# Altium PCB 项目-6层核心板.PcbDoc (part 1 of 3)
Units mil, origin at the board's own origin, x right, y up, seen from the top; angles counter-clockwise.
Board outline 2165.35 x 1574.8 mil, 6 copper layers (TOP, GND02, ART03, ART04, PWR05, BOTTOM); 172 components, 0 nets, 834 pads, 541 vias.
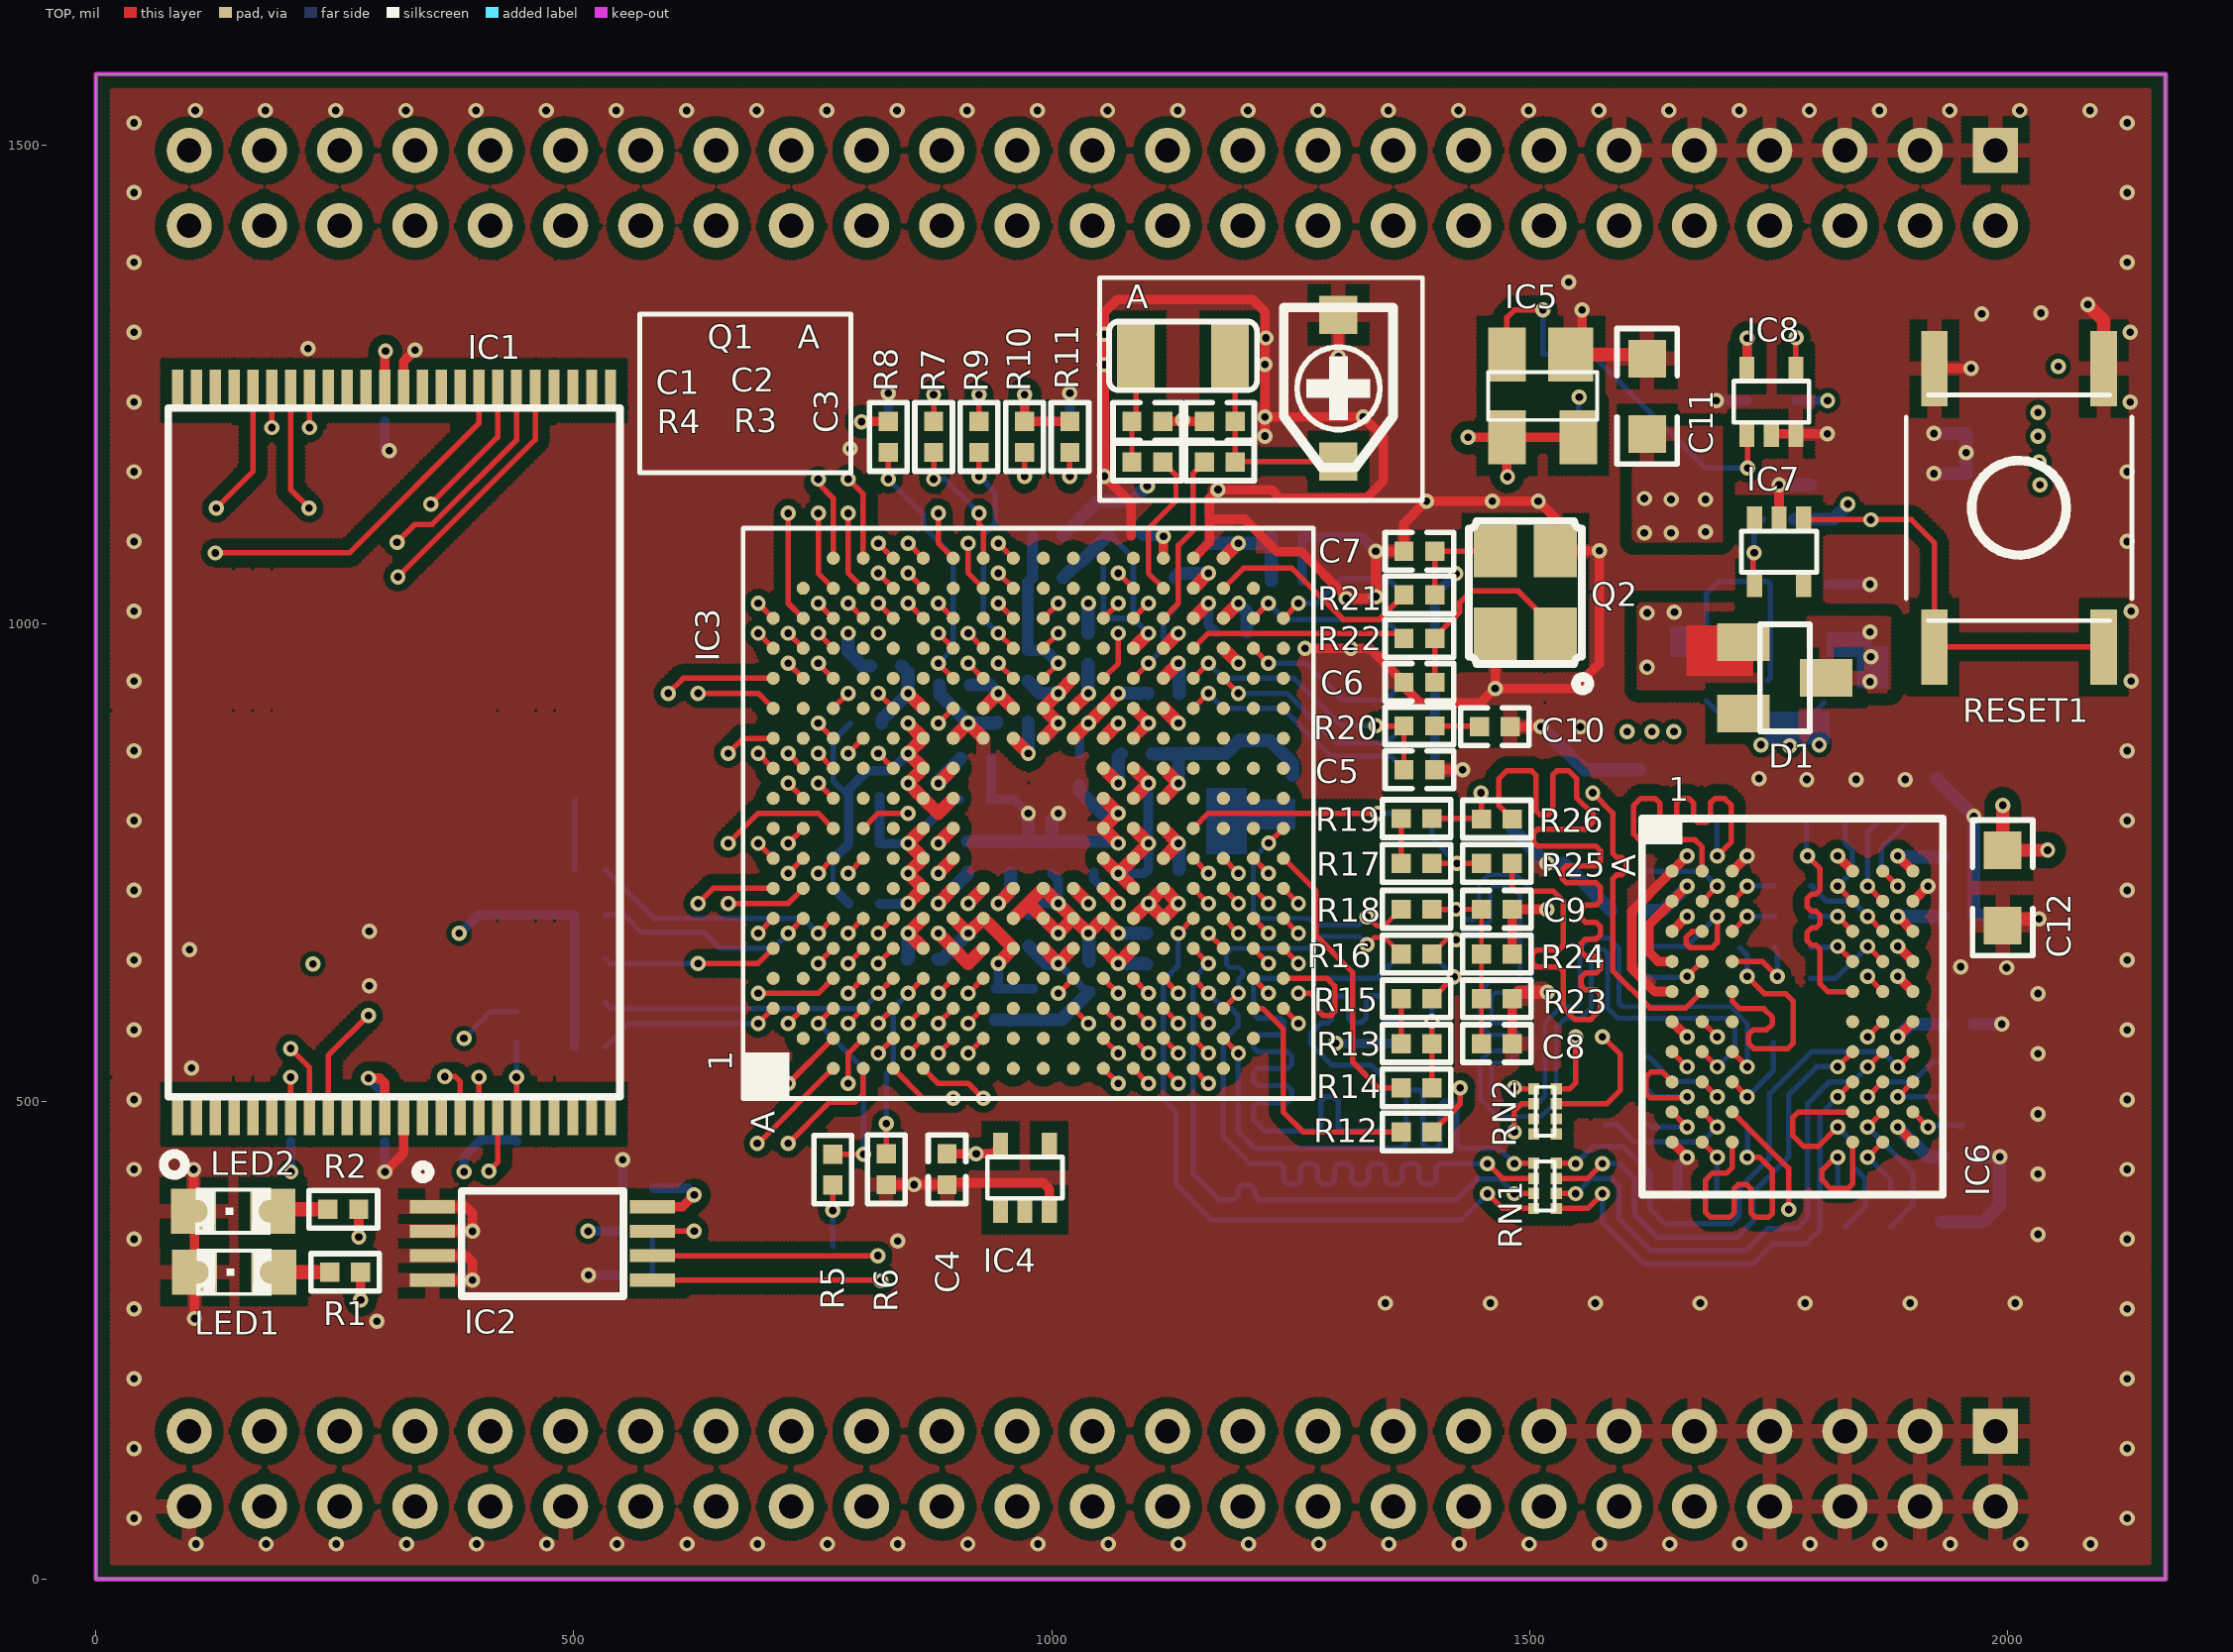
[diagram p0: TOP view]
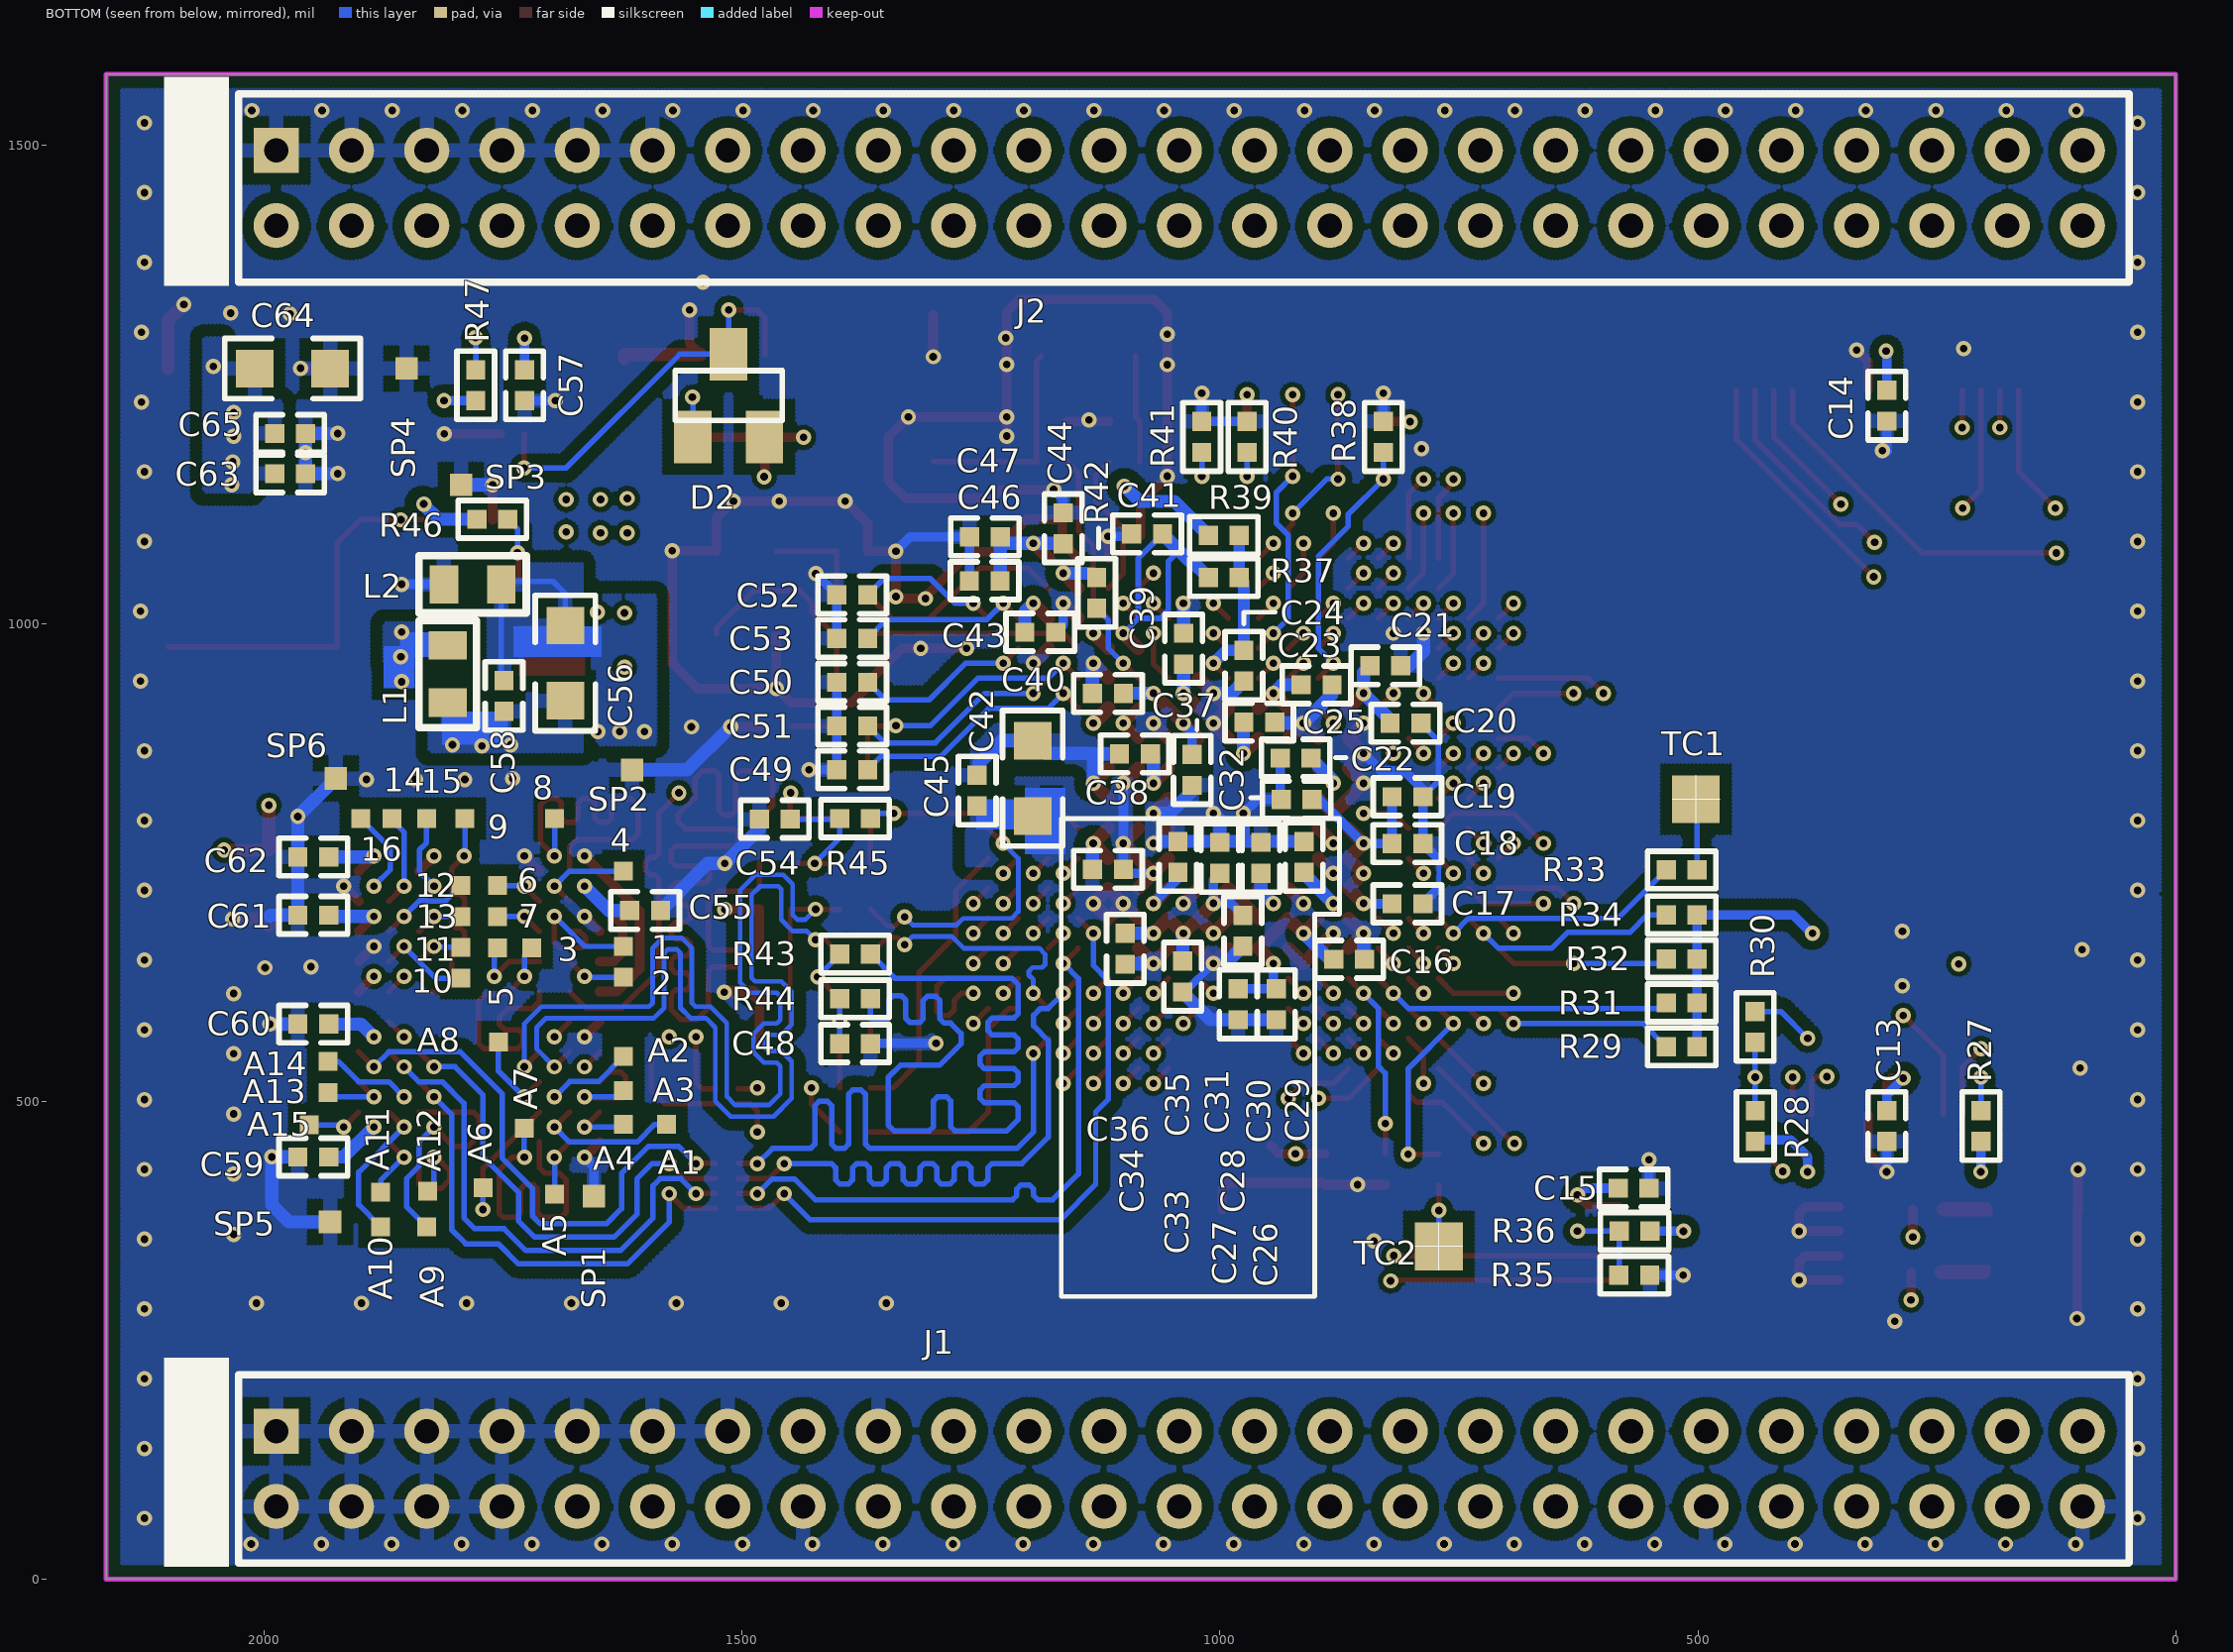
[diagram p1: BOTTOM view, seen from below]
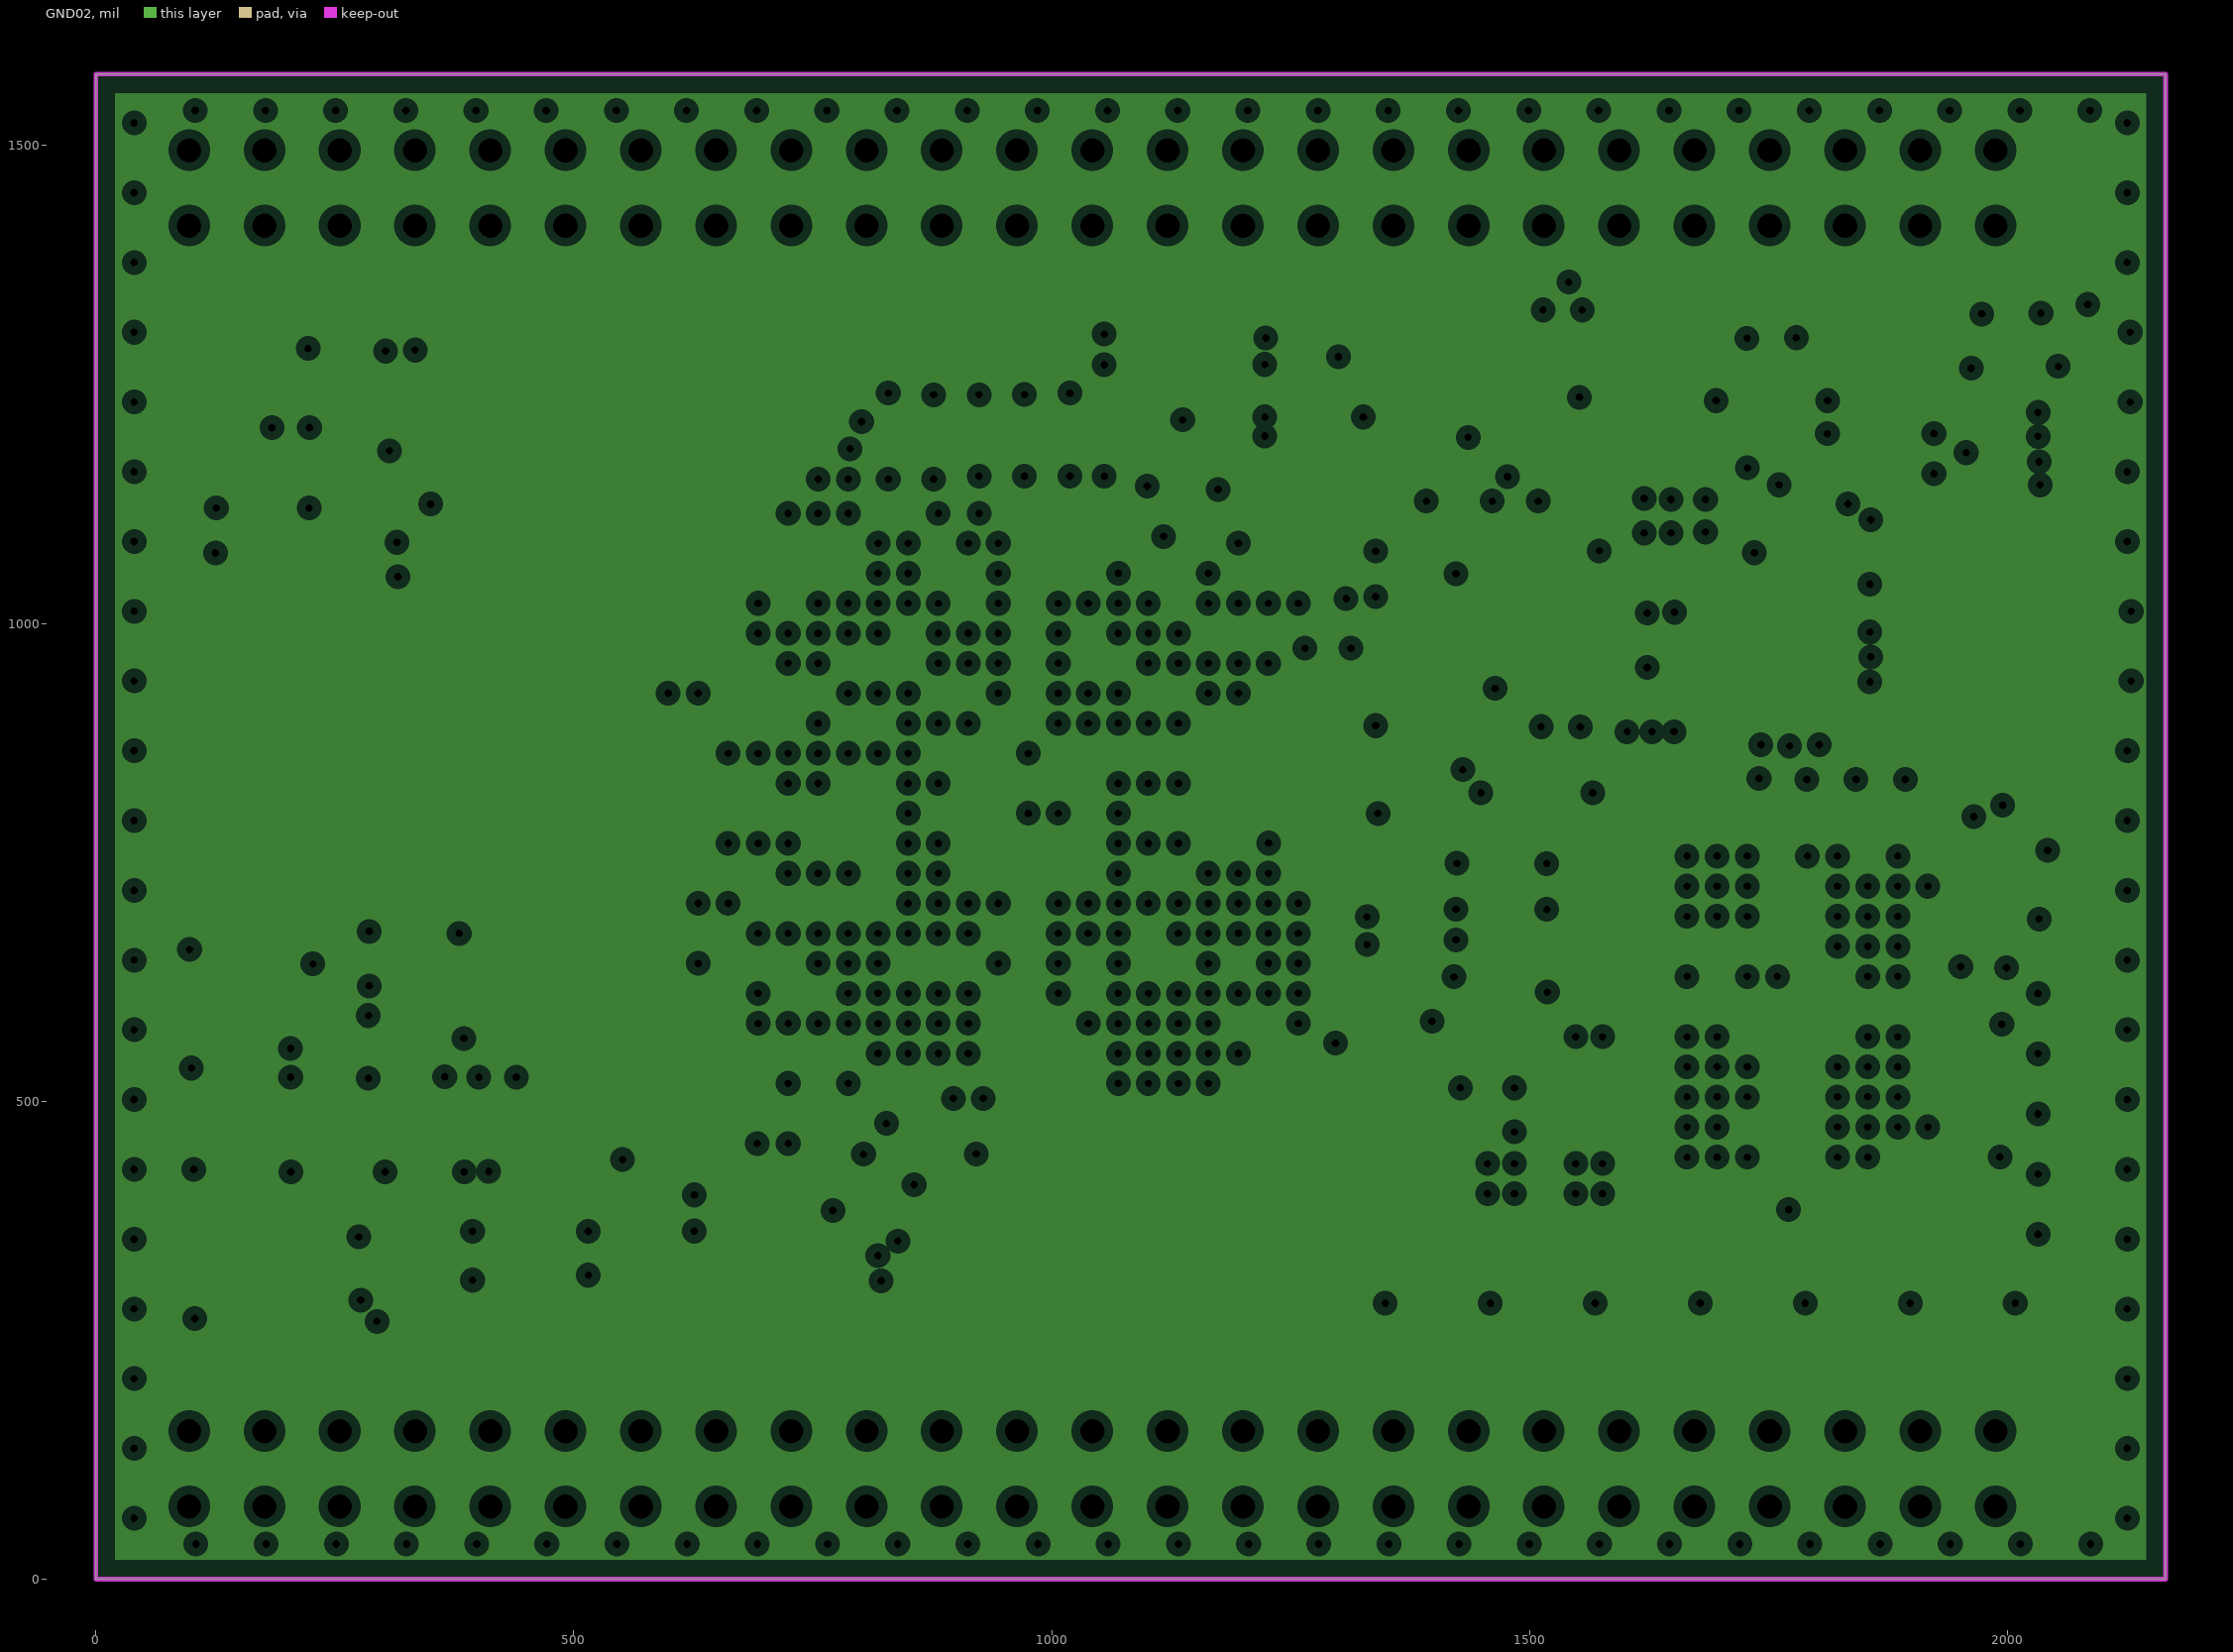
[diagram p2: GND02, clearances drawn from the general rule]
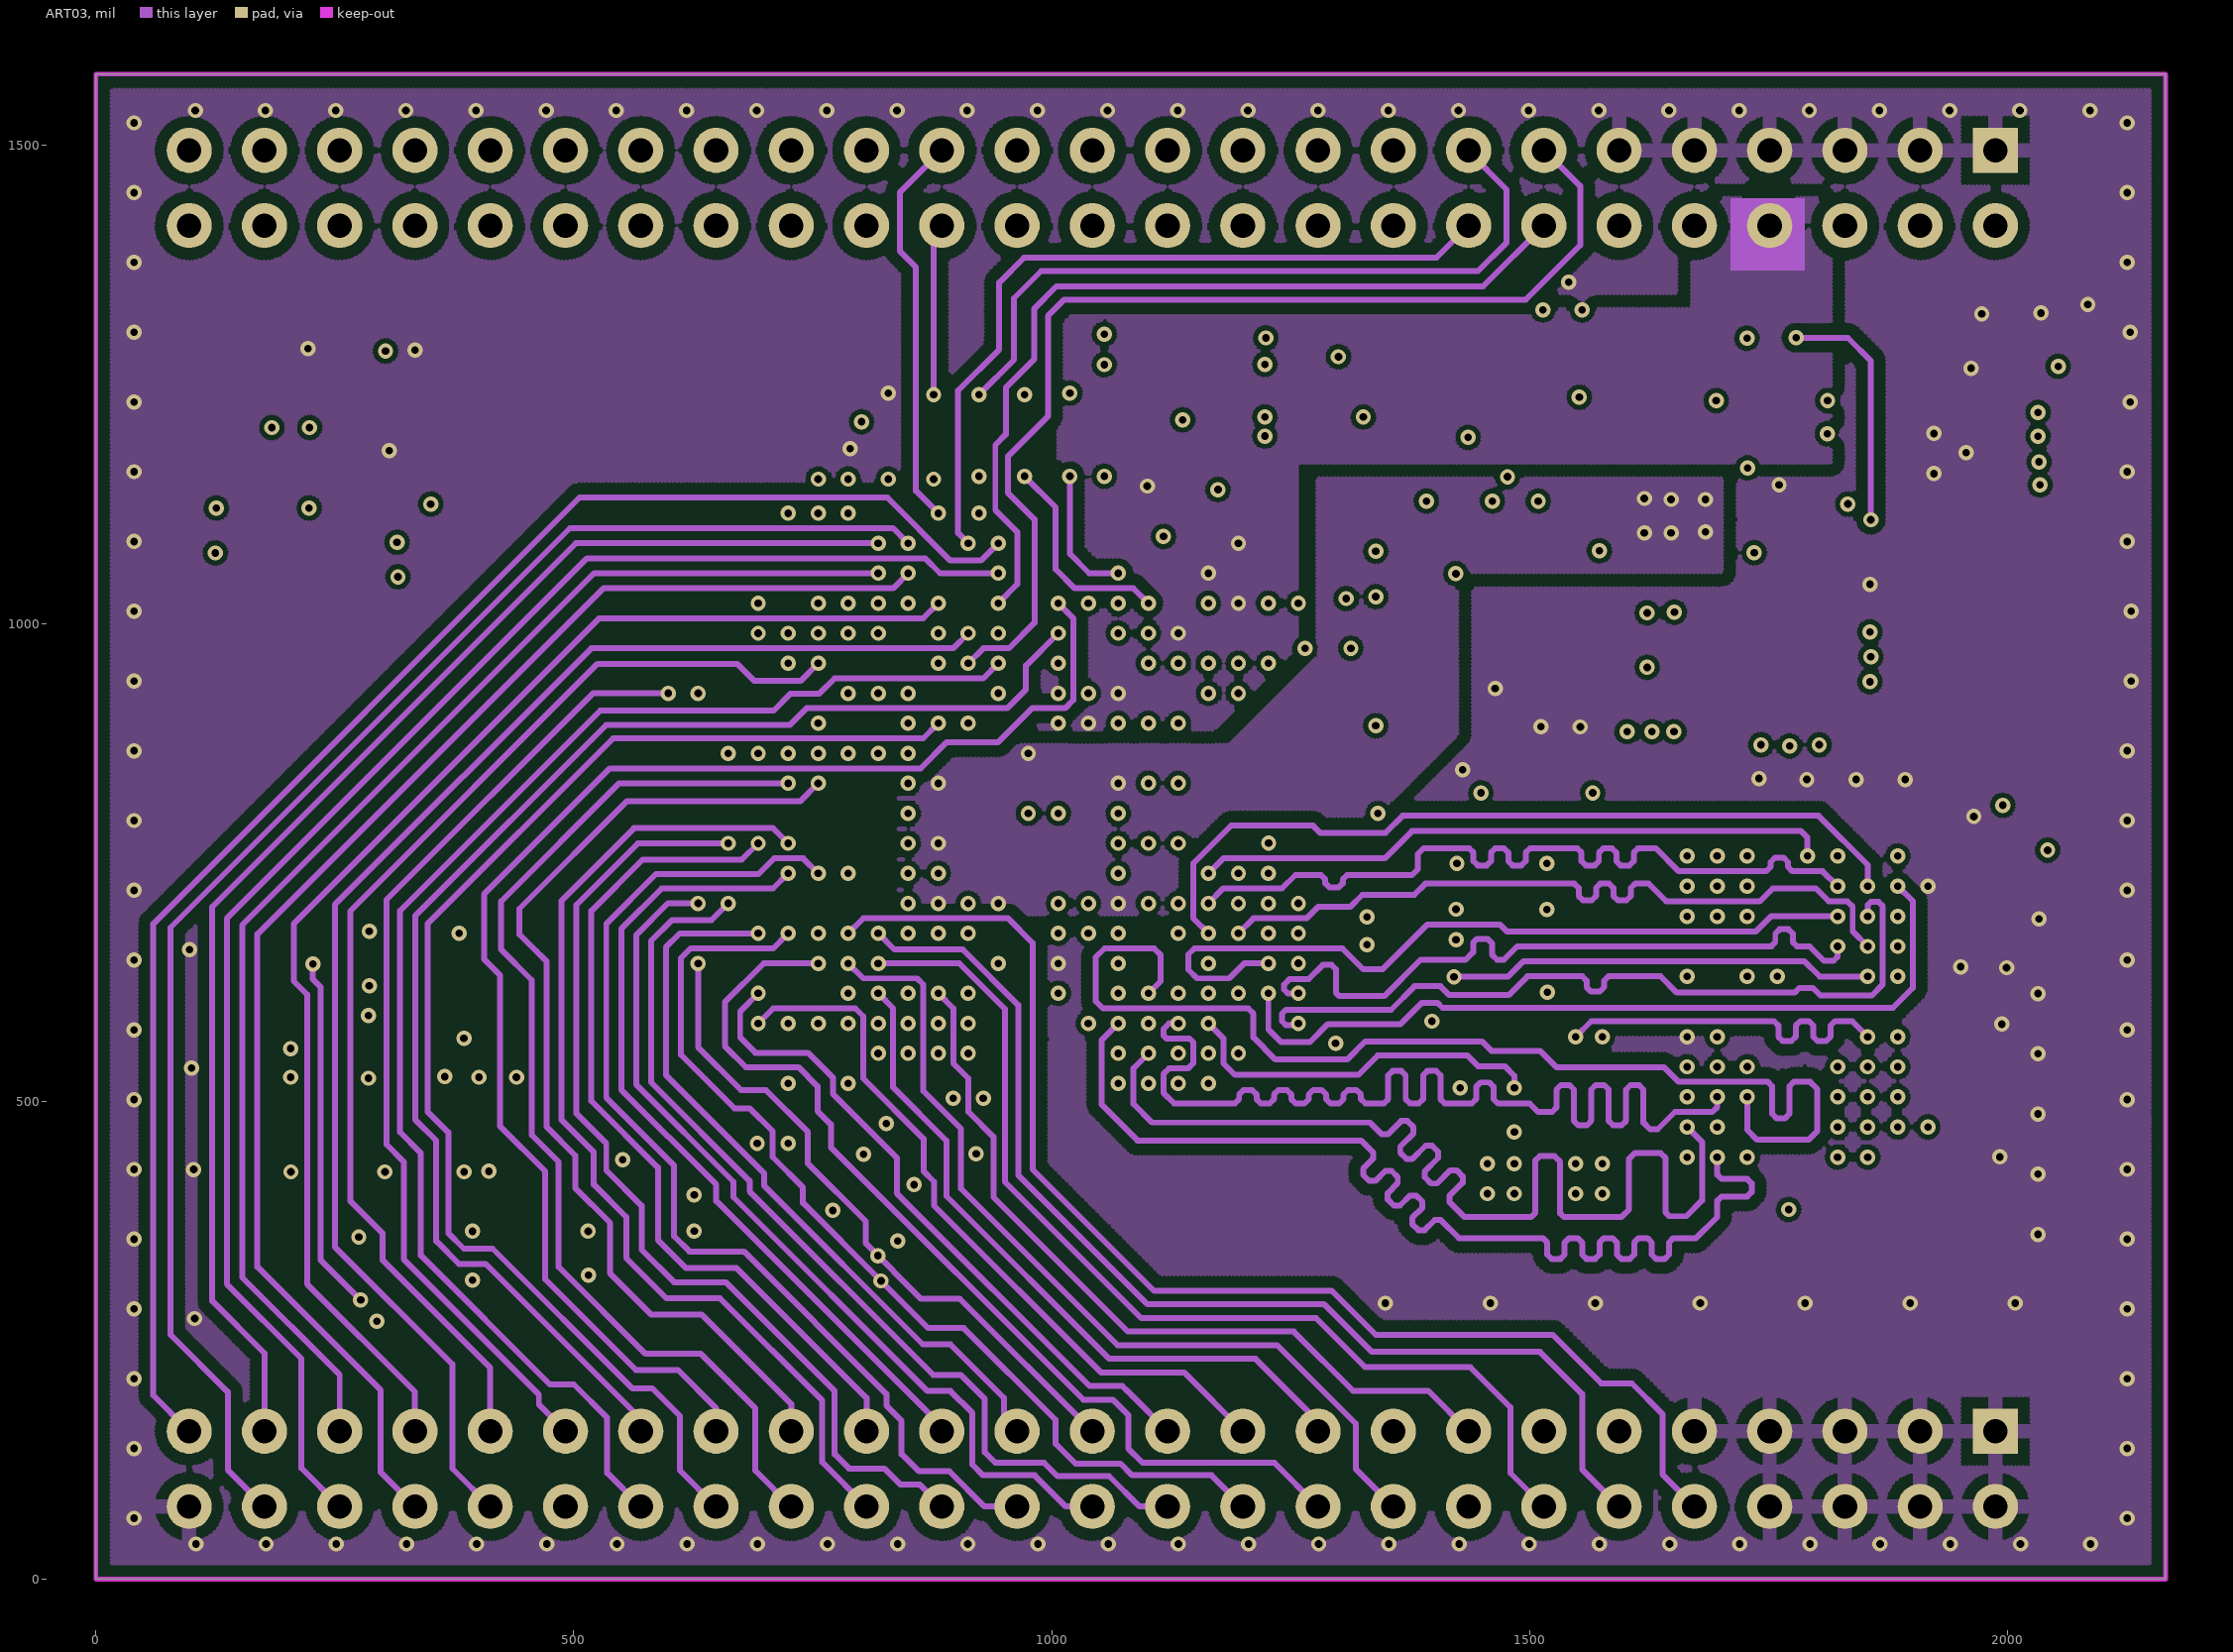
[diagram p3: ART03]
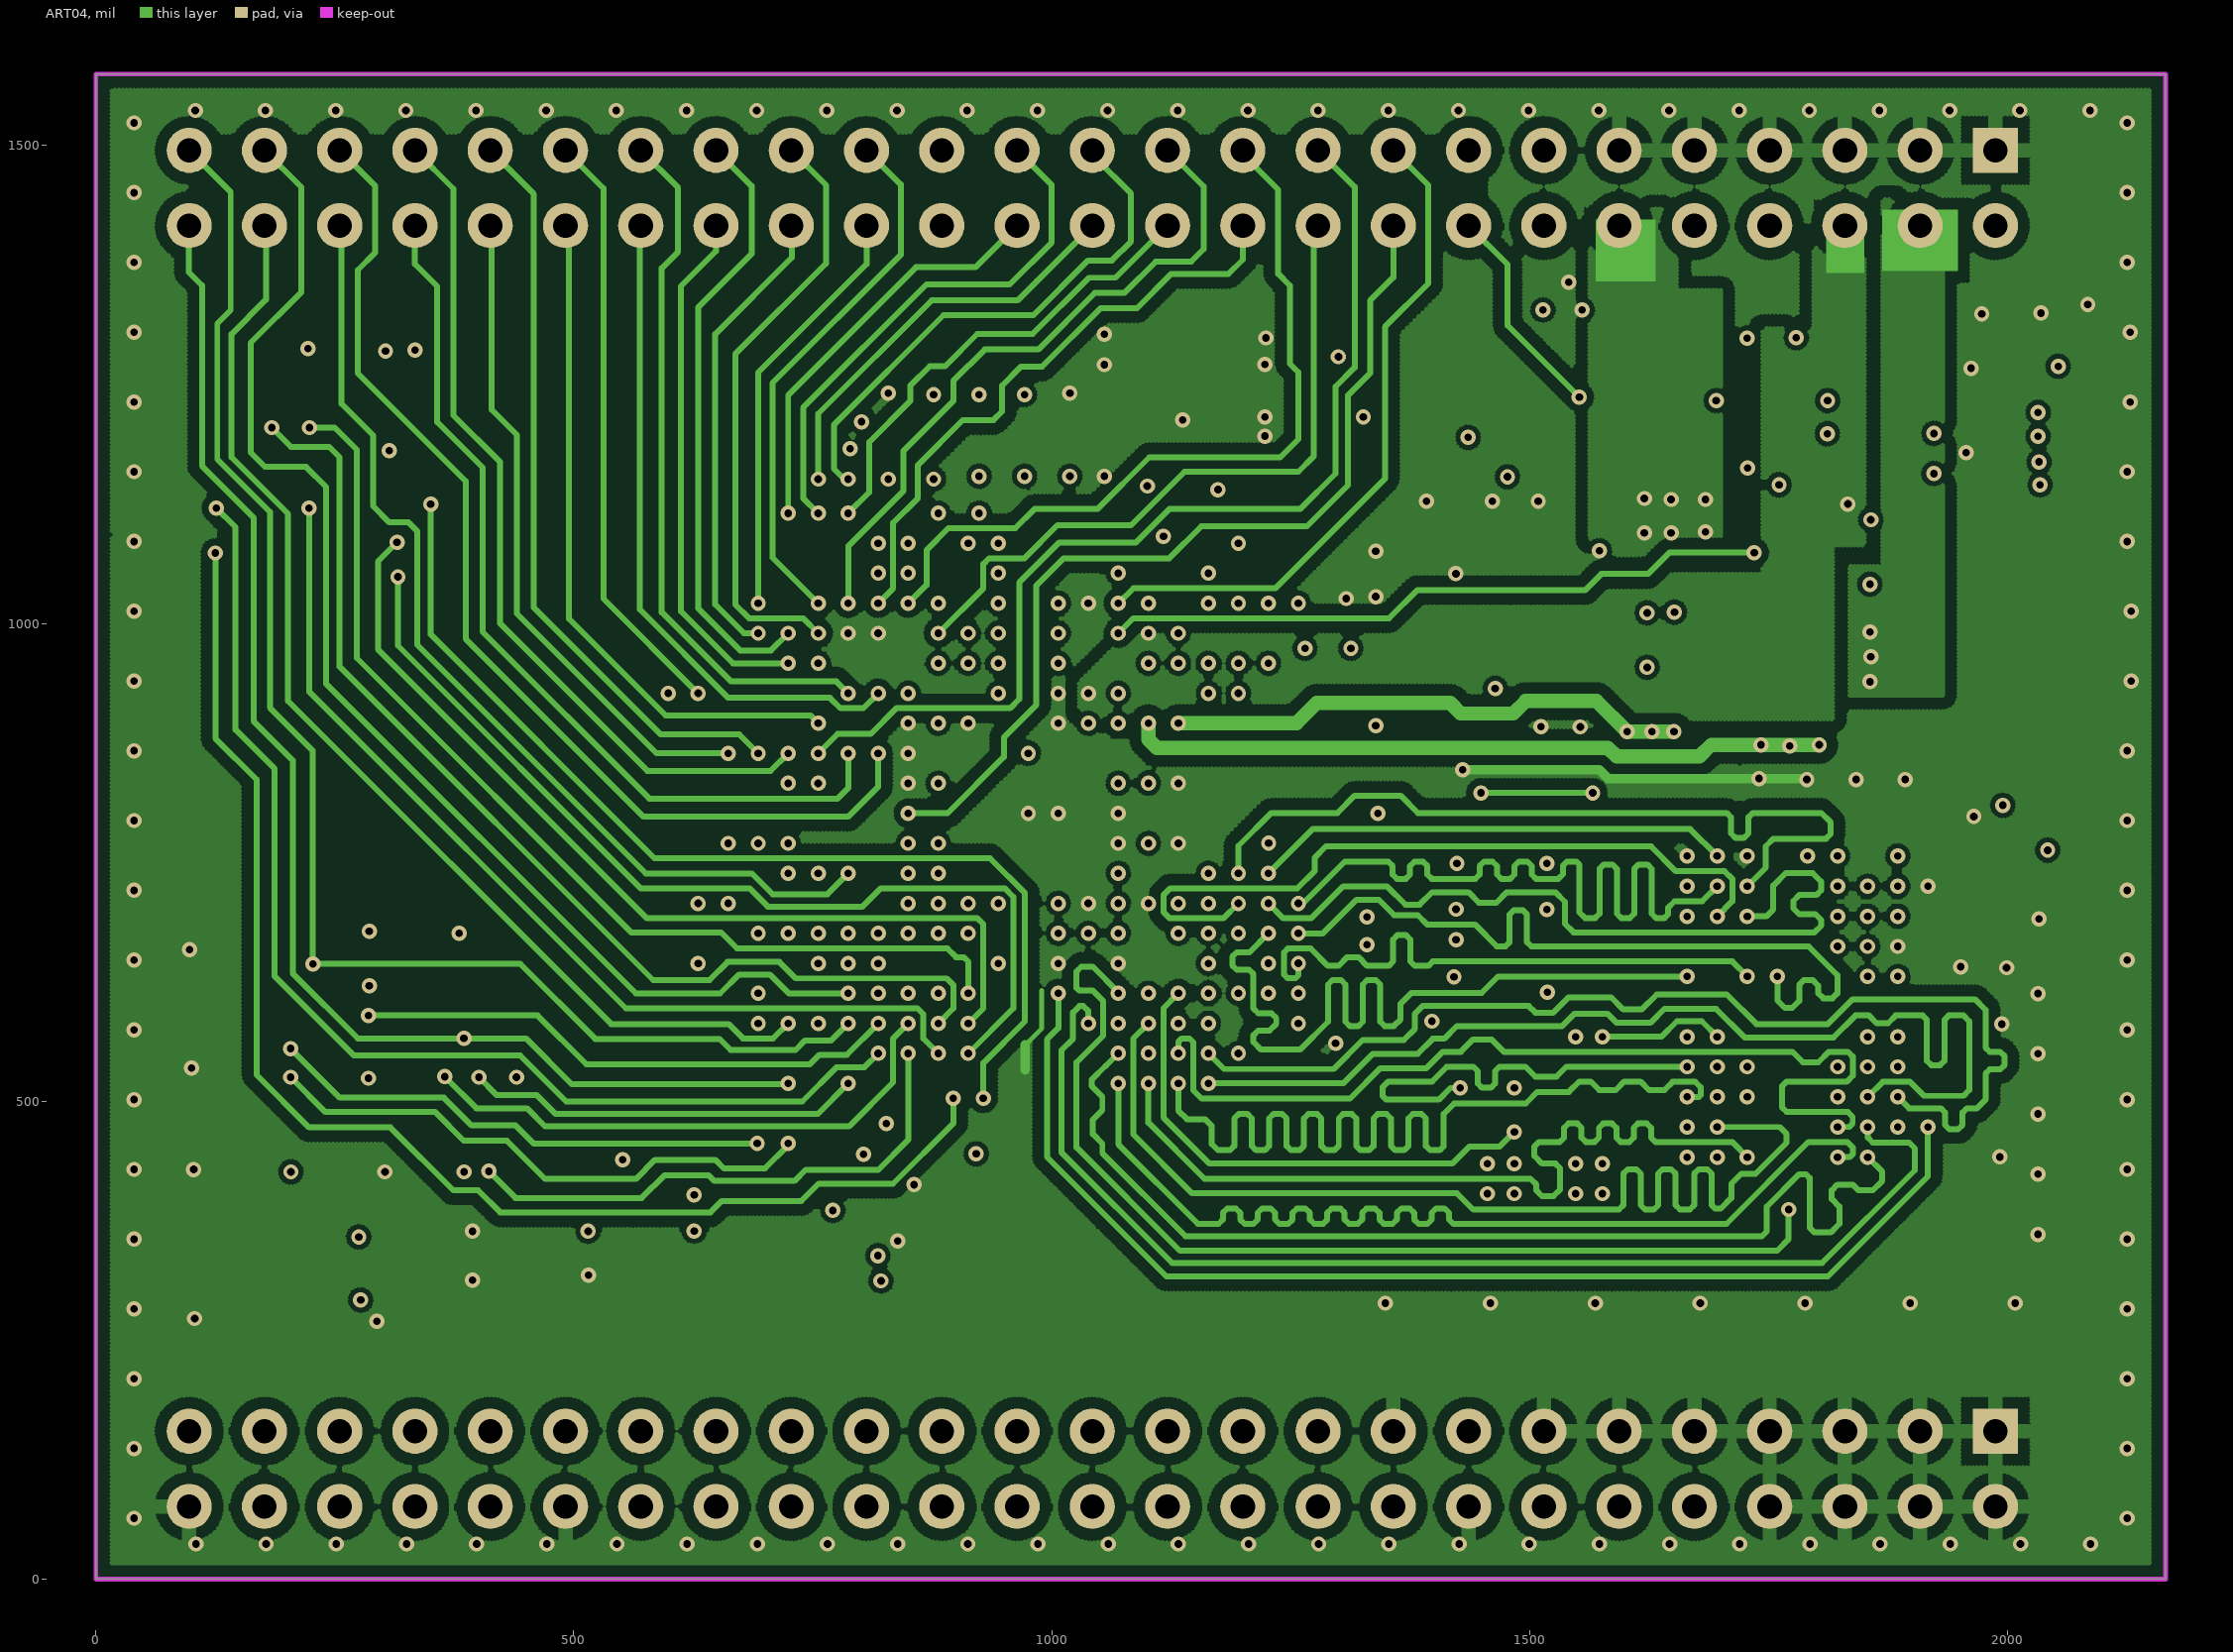
[diagram p4: ART04]
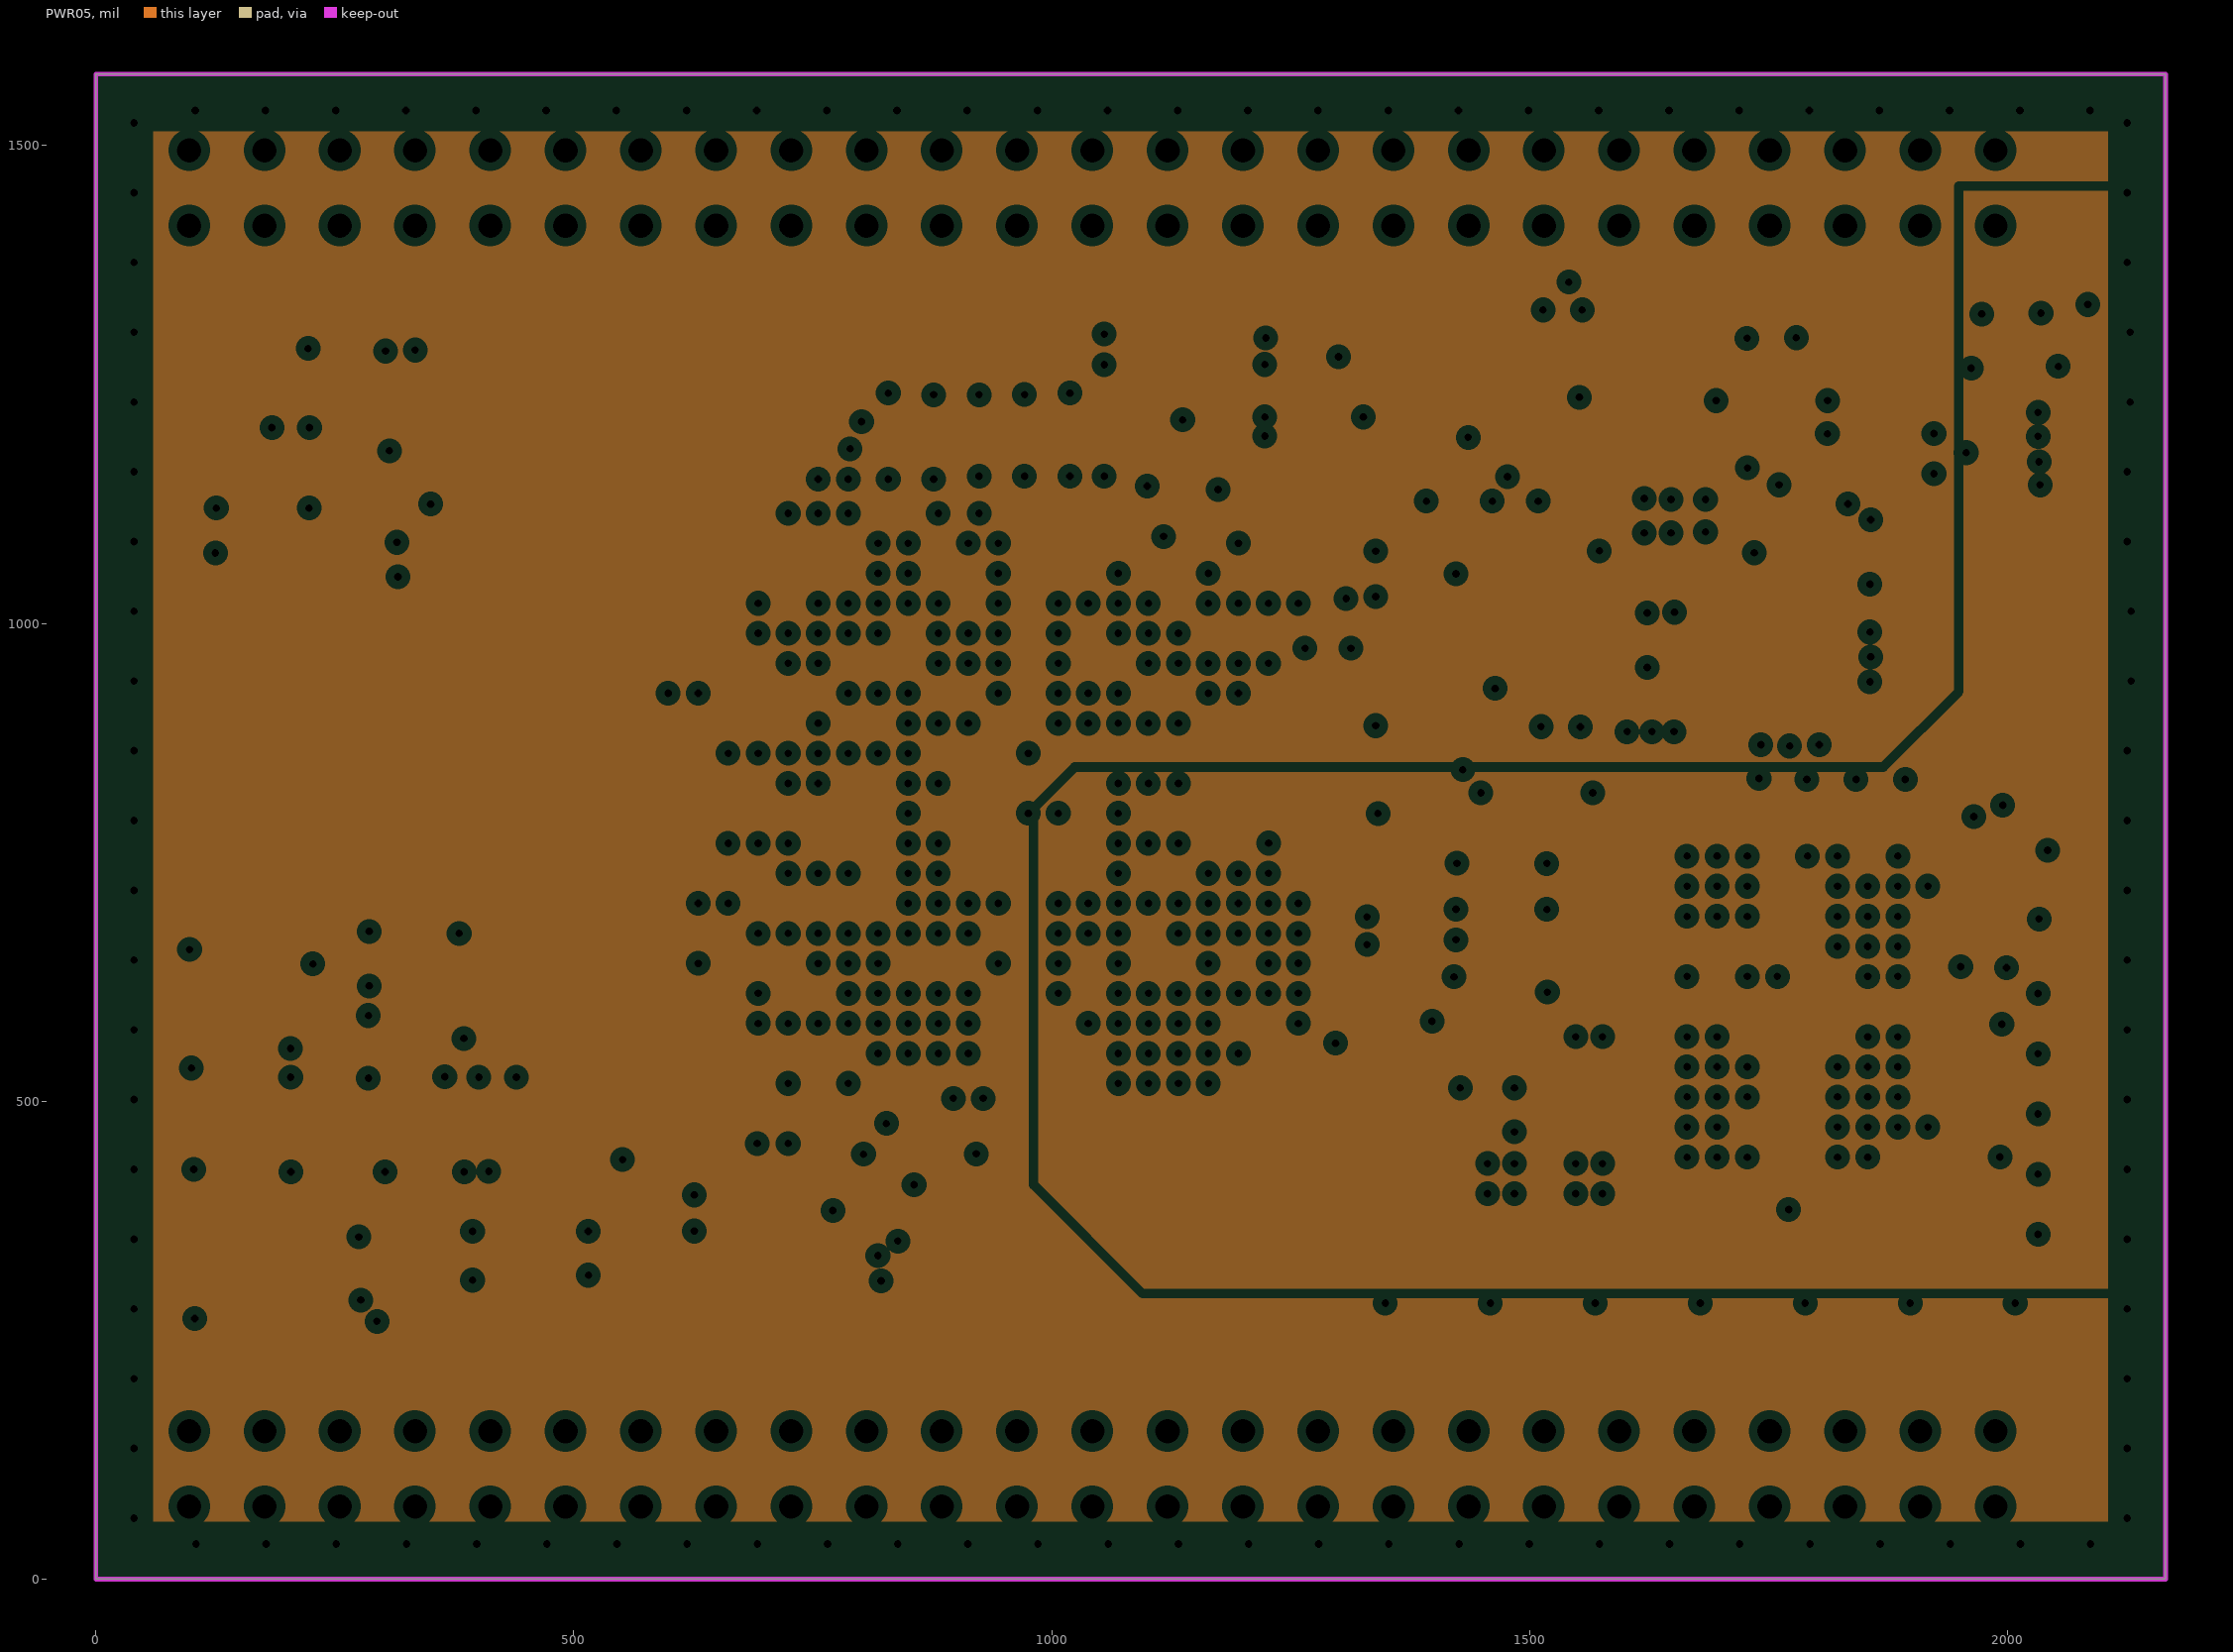
[diagram p5: PWR05, clearances drawn from the general rule]

## Layer stack, top to bottom
TOP: signal copper 1.4
Dielectric: core 12.6, FR-4, Dk 4.8
GND02: plane copper 1.4
Dielectric: prepreg 12.6, FR-4, Dk 4.8
ART03: signal copper 1.4
Dielectric: core 12.6, FR-4, Dk 4.8
ART04: signal copper 1.4
Dielectric: prepreg 12.6, FR-4, Dk 4.8
PWR05: plane copper 1.4
Dielectric: core 12.6, FR-4, Dk 4.8
BOTTOM: signal copper 1.4

## Board outline
0,0 2165.35,0 2165.35,1574.8 0,1574.8

## Design rules (kind name [scope] priority, off if disabled: settings)
Clearance [ISVIA vs INPOLY] p1: gap=5
Clearance POLY-ALL [INPOLY] p2: gap=12
Clearance ALL [All] p3: gap=4.5
DiffPairsRouting DiffPair_100DiffPairsRouting [InDifferentialPairClass('100om')] p1: maxlimit=7 minlimit=7 mostfreqgap=7 maxuncoupledlength=500
MatchedLengths DiffPair_100MatchedLengths [InDifferentialPairClass('100om')] p1: tolerance=1000 checknetsindiffpair=TRUE checkdiffpairvsdiffpair=TRUE checkothers=TRUE
PlaneClearance [All] p1: clearance=9
PlaneConnect [All] p1: planeconnectstyle=Direct reliefexpansion=20 reliefentries=4 reliefconductorwidth=10 reliefairgap=10
PolygonConnect PolygonConnect_1 [ISVIA] p1: connectstyle=Direct reliefconductorwidth=10 reliefentries=4 polygonreliefangle="90 Angle"
PolygonConnect [All] p2: connectstyle=Relief reliefconductorwidth=15 reliefentries=4 polygonreliefangle="90 Angle"
RoutingVias [All] p1: holewidth=8 width=16 viastyle="Through Hole" minholewidth=8 minwidth=16 maxholewidth=8 maxwidth=16
SilkscreenOverComponentPads [All] p1: minsilkscreentomaskgap=10
SolderMaskExpansion [All] p1: expansion=2.5
Width DiffPair_100Width [(InDifferentialPairClass('100om'))] p1: maxlimit=5 minlimit=4.5 preferedwidth=5 toplayer_minwidth=5 midlayer1_maxwidth=4.5 midlayer1_prefwidth=4.5 midlayer2_maxwidth=4.5 midlayer2_prefwidth=4.5 bottomlayer_minwidth=5 minimp=50.000000 maximp=50.000000 favimp=50.000000
Width PWR [InNetClass('PWR')] p2: maxlimit=30 minlimit=10 preferedwidth=15
Width [All] p3: maxlimit=6.2 minlimit=5.7 preferedwidth=6.2 toplayer_maxwidth=5.7 toplayer_prefwidth=5.7 midlayer1_minwidth=6.2 midlayer2_minwidth=6.2 bottomlayer_maxwidth=5.7 bottomlayer_prefwidth=5.7 minimp=50.000000 maximp=50.000000 favimp=50.000000
24 further rules are at their usual default settings.

## Classes and differential pairs
net class D8-D15: CPU_DDR_DQS1 DBUS8 DBUS9 DBUS10 DBUS11 DBUS12 DBUS13 DBUS14 DBUS15 DDR_DSQ1 DQM1 NetIC7_R9
net class D0-D7: CPU_DDR_DQS0 DBUS0 DBUS1 DBUS2 DBUS3 DBUS4 DBUS5 DBUS6 DBUS7 DDR_DSQ0 DQM0 NetIC7_V8
net class DDRA: !CAS !DDR_CLK !RAS !WR ABUS0 ABUS1 ABUS2 ABUS3 ABUS4 ABUS5 ABUS6 ABUS7 ABUS8 ABUS9 ABUS10 ABUS11 ABUS12 ABUS13 ABUS14 DDR_CKE DDR_CLK DYCS0
net class ZZ: !SYS_RESET! !USB_ATX_INT! !USB_OE_TP! CD/DAT3 CLK CMD DAT0 DAT1 DAT2 EN_CRS EN_MDC EN_MDIO EN_RXCLK EN_RXD0 EN_RXD1 EN_RXDV EN_RXER EN_TXD0 EN_TXD1 EN_TXEN GPI_0 GPI_01/!SERVICE GPI_4 GPI_19/U4_RX GPIO_00 GPIO_01 GPIO_04/SSEL1/LCDVD22 GPO19/!WP_NAND! GPO_01 GPO_02 GPO_03 GPO_04 GPO_05 GPO_06/LCDVD(18) GPO_07/LCDVD(2) GPO_08/LCDVD(8) GPO_09/LCDVD(9) GPO_10/MCOB2 GPO_14 GPO_21/U4_TX/LCDVD(3) GPO_23/U2_HRTS/U3_RTS I2C1_SCL I2C1_SDA I2C2_SCL I2C2_SDA JTAG_NTRST JTAG_RTCK JTAG_TCK JTAG_TDI JTAG_TDO JTAG_TMS OVRCNT_B SPEED SPI1_CLK/SCK0 SPI1_DATIN/MISO0/GPI_25 SPI1_DATIO/MOSI0 SPI2_CLK/SCK1/LCDVD23 U1_RX/GPI_15 U1_TX U2_HCTS/U3_CTS/GPI_16 U3_RX/GPI_18 U3_TX U5_RX/GPI_20 U5_TX U6_IRRX/GPI_21 U6_IRTX U7_HCTS/CAP0.1 U7_RX/CAP0.0/LCDVD U7_TX/MAT1.1/LCDVD USB_DAT_VP USB_I2C_SCL USB_I2C_SDA USB_SE0_VM
net class EN: EN_CRS EN_MDC EN_MDIO EN_RXCLK EN_RXD0 EN_RXD1 EN_RXDV EN_RXER EN_TXD0 EN_TXD1 EN_TXEN
net class JTAG: JTAG_NTRST JTAG_RTCK JTAG_TCK JTAG_TDI JTAG_TDO JTAG_TMS
net class I2C: I2C1_SCL I2C1_SDA I2C2_SCL I2C2_SDA
net class PWR: GND NetC41_1 NetC41_2 VDD_1V2 VDD_1V2_RTC VDD_1V2_VAR(1V33) VDD_3V3 VDD_EMC VDDA
component class "DDR RAM,NAND Flash": 1 2 3 4 5 6 7 8 9 10 11 12 13 14 15 16 A1 A2 A3 A4 A5 A6 A7 A8 A9 A10 A11 A12 A13 A14 A15 C8 C9 C12 C13 C14 C48 C54 C55 C59 C60 C61 C62 IC1 IC6 R12 R13 R14 R15 R16 R17 R18 R19 R23 R24 R25 R26 R27 R28 R30 R43 R44 R45 RN1 RN2 SP1 SP2 SP3 SP4 SP5 SP6
component class "Power supplies": C11 C16 C17 C18 C19 C20 C21 C22 C23 C24 C25 C26 C27 C28 C29 C30 C31 C32 C33 C34 C35 C36 C37 C38 C39 C40 C41 C42 C43 C44 C45 C46 C47 C56 C58 C63 C64 C65 D1 J1 J2 L1 L2 R37 R39 R42
component class "Reset,oscillators,JTAG Extensions LEDs,Buttons": C1 C2 C3 C4 C5 C6 C7 C10 C15 C49 C50 C51 C52 C53 C57 D2 IC2 IC3 IC4 IC5 IC7 IC8 LED1 LED2 Q1 Q2 R1 R2 R3 R4 R5 R6 R7 R8 R9 R10 R11 R20 R21 R22 R29 R31 R32 R33 R34 R35 R36 R38 R40 R41 R46 R47 R73 R74 RESET1 TC1 TC2
net class GPIO: GPI_0 GPI_01/!SERVICE GPI_4 GPI_19/U4_RX GPIO_00 GPIO_01 GPIO_04/SSEL1/LCDVD22 GPO19/!WP_NAND! GPO_01 GPO_02 GPO_03 GPO_04 GPO_05 GPO_06/LCDVD(18) GPO_07/LCDVD(2) GPO_08/LCDVD(8) GPO_09/LCDVD(9) GPO_10/MCOB2 GPO_14 GPO_21/U4_TX/LCDVD(3) GPO_23/U2_HRTS/U3_RTS
differential pair class 100om: CLK DDR_CLK
differential pair DDR_CLK: +"" -""
differential pair CLK: +"" -""

## Components (designator, comment, footprint, x,y, rotation, side; value= is the part's Value field where it differs from the comment)
1 "*" B0,5MM 1624.01,662.04 r270 bottom (schematic designator 11)
2 "*" B0,5MM 1624.01,629.73 r180 bottom (schematic designator 9)
3 "*" B0,5MM 1720.01,660.73 r180 bottom (schematic designator 8)
4 "*" B0,5MM 1624.01,740.73 r270 bottom (schematic designator 13)
5 "*" B0,5MM 1756.01,660.73 r270 bottom (schematic designator 10)
6 "*" B0,5MM 1756.01,725.73 r270 bottom (schematic designator 14)
7 "*" B0,5MM 1756.01,693.4 r270 bottom (schematic designator 12)
8 "*" B0,5MM 1696.01,795.73 r180 bottom (schematic designator 15)
9 "*" B0,5MM 1790.01,795.73 r180 bottom (schematic designator 7)
10 "*" B0,5MM 1794.01,628.73 r180 bottom (schematic designator 6)
11 "*" B0,5MM 1794.01,661.06 r180 bottom (schematic designator 5)
12 "*" B0,5MM 1794.01,725.73 r180 bottom (schematic designator 4)
13 "*" B0,5MM 1794.01,693.4 r180 bottom (schematic designator 3)
14 "*" B0,5MM 1866.01,795.73 r180 bottom (schematic designator 2)
15 "*" B0,5MM 1830.01,795.73 r180 bottom (schematic designator 1)
16 "*" B0,5MM 1899.01,795.73 r180 bottom (schematic designator 0)
A1 "*" B0,5MM 1579.01,475.73 r270 bottom (schematic designator A7)
A2 "*" B0,5MM 1624.01,546.73 r180 bottom (schematic designator A11)
A3 "*" B0,5MM 1624.01,511.23 r270 bottom (schematic designator A9)
A4 "*" B0,5MM 1624.01,475.73 r180 bottom (schematic designator A6)
A5 "*" B0,5MM 1696.01,402.73 r270 bottom (schematic designator A4)
A6 "*" B0,5MM 1771.01,409.73 r180 bottom (schematic designator A8)
A7 "*" B0,5MM 1728.01,471.73 r270 bottom (schematic designator A5)
A8 "*" B0,5MM 1755.01,561.73 r180 bottom (schematic designator A12)
A9 "*" B0,5MM 1830.01,368.73 r180 bottom (schematic designator A10)
A10 "*" B0,5MM 1878.01,368.73 r270 bottom (schematic designator A0)
A11 "*" B0,5MM 1878.01,404.73 r270 bottom (schematic designator A3)
A12 "*" B0,5MM 1829.01,405.73 r270 bottom (schematic designator A2)
A13 "*" B0,5MM 1933.01,509.23 r180 bottom (schematic designator A14)
A14 "*" B0,5MM 1933.01,541.73 r180 bottom (schematic designator A13)
A15 "*" B0,5MM 1952.91,475.28 r270 bottom (schematic designator A1)
C1 "22p" 0402C 1100,1211.28 r180 top (schematic designator C63)
C2 "22p" 0402C 1176,1211.28 r0 top (schematic designator C62)
C3 "5-20p" CTRIMCTZ3 1300,1246 r180 top (schematic designator C20)
C4 "100n" 0402C 890.49,428.86 r270 top (schematic designator C66)
C5 "150p" 0402C 1384.64,847 r0 top (schematic designator C65)
C6 "22p" 0402C 1384.64,938.45 r0 top (schematic designator C61)
C7 "22p" 0402C 1384.64,1075.62 r0 top (schematic designator C60)
C8 "na" 0402C 1465.7,560.34 r0 top (schematic designator C76)
C9 "na" 0402C 1465.7,700.91 r180 top (schematic designator C77)
C10 "3n9" 0402C 1463.7,892 r180 top (schematic designator C64)
C11 "10u/X7R" 0805C 1623.01,1237.63 r90 top (schematic designator C38)
C12 "10u/X7R" 0805C 1995.01,723.36 r270 top (schematic designator C83)
C13 "100n" 0402C 302.16,474 r270 bottom (schematic designator C68)
C14 "10n" 0402C 302.16,1227.8 r270 bottom (schematic designator C67)
C15 "100n" 0402C 567.17,409 r0 bottom (schematic designator C9)
C16 "100n" 0402C 864.86,648.6 r180 bottom (schematic designator C59)
C17 "100n" 0402C 803.86,706.6 r180 bottom (schematic designator C57)
C18 "10n" 0402C 803.86,769.6 r180 bottom (schematic designator C58)
C19 "100n" 0402C 803.86,818.6 r180 bottom (schematic designator C55)
C20 "10n" 0402C 805.86,895.6 r180 bottom (schematic designator C54)
C21 "100n" 0402C 826.86,955.6 r180 bottom (schematic designator C51)
C22 "10n" 0402C 920.83,859 r0 bottom (schematic designator C31)
C23 "10n" 0402C 898.87,935.73 r180 bottom (schematic designator C52)
C24 "100n" 0402C 975.01,955.73 r270 bottom (schematic designator C45)
C25 "100n" 0402C 958.87,896.73 r180 bottom (schematic designator C36)
C26 "10n" 0402C 941,601.46 r270 bottom (schematic designator C56)
C27 "100n" 0402C 981,601.46 r270 bottom (schematic designator C53)
C28 "10n" 0402C 976,678.46 r270 bottom (schematic designator C18)
C29 "100n" 0402C 912,755.74 r90 bottom (schematic designator C35)
C30 "10n" 0402C 957,754.74 r90 bottom (schematic designator C33)
C31 "10n" 0402C 1000,754.74 r90 bottom (schematic designator C12)
C32 "10n" 0402C 919.86,815.6 r0 bottom (schematic designator C50)
C33 "10n" 0402C 1039,630.46 r270 bottom (schematic designator C17)
C34 "100n" 0402C 1099.01,659.59 r270 bottom (schematic designator C13)
C35 "100n" 0402C 1044,755.74 r90 bottom (schematic designator C37)
C36 "100n" 0402C 1117.14,742.6 r0 bottom (schematic designator C29)
C37 "100n" 0402C 1029,846.74 r270 bottom (schematic designator C40)
C38 "10n" 0402C 1089,863.6 r0 bottom (schematic designator C32)
C39 "100n" 0402C 1038,973.6 r90 bottom (schematic designator C43)
C40 "10n" 0402C 1117.14,926.6 r0 bottom (schematic designator C39)
C41 "100n" 0402C 1076.15,1093.73 r0 bottom (schematic designator C44)
C42 "10u/X7R" 0805C 1196,838 r90 bottom (schematic designator C14)
C43 "100n" 0402C 1188,990.73 r180 bottom (schematic designator C48)
C44 "100n" 0402C 1164,1099.6 r90 bottom (schematic designator C49)
C45 "100n" 0402C 1254,825 r90 bottom (schematic designator C25)
C46 "100n" 0402C 1246.14,1044.6 r0 bottom (schematic designator C47)
C47 "100n" 0402C 1245.86,1090.6 r0 bottom (schematic designator C46)
C48 "na" 0402C 1381.7,560.34 r180 bottom (schematic designator C75)
C49 "1n" 0402C 1384.64,847 r0 bottom (schematic designator C70)
C50 "1n" 0402C 1384.64,938.45 r0 bottom (schematic designator C73)
C51 "1n" 0402C 1384.64,892.72 r0 bottom (schematic designator C72)
C52 "1n" 0402C 1384.64,1029.9 r0 bottom (schematic designator C71)
C53 "1n" 0402C 1384.64,984.17 r0 bottom (schematic designator C69)
C54 "na" 0402C 1465.7,795.23 r0 bottom (schematic designator C74)
C55 "100n" 0402C 1601.38,699.73 r180 bottom (schematic designator C82)
C56 "10u/X7R" 0805C 1685,958.37 r90 bottom (schematic designator C42)
C57 "100n" 0402C 1727.41,1249.32 r90 bottom (schematic designator C1)
C58 "10n" 0402C 1749,924.14 r90 bottom (schematic designator C41)
C59 "10n" 0402C 1948.62,441.73 r0 bottom (schematic designator C79)
C60 "100n" 0402C 1948.62,580.73 r0 bottom (schematic designator C80)
C61 "100n" 0402C 1948.62,694.73 r0 bottom (schematic designator C81)
C62 "10n" 0402C 1948.62,755.73 r0 bottom (schematic designator C78)
C63 "10n" 0402C 1972.87,1156.73 r180 bottom (schematic designator C15)
C64 "10u/X7R" 0805C 1970.38,1266.67 r180 bottom (schematic designator C30)
C65 "100n" 0402C 1972.87,1198.73 r180 bottom (schematic designator C16)
D1 "BAT754" SOT23 1767,943 r270 top
D2 "BAT754" SOT23 1514,1238.38 r180 bottom (schematic designator D10)
IC1 "*" TSOP48 312,865 r90 top (schematic designator IC9)
IC2 "24LC256-I/ST" TSSOP8 467.15,351.2 r270 top (schematic designator IC4)
IC3 "*" SOT1048-1 975.51,801.3 r90 top (schematic designator IC7)
IC4 "" SC70-5 972,420 r0 top (schematic designator IC8P)
IC5 "*" SOT143 1513.6,1238 r0 top (schematic designator IC1)
IC6 "H5MS5162EFR" FBGA60-6X10 1775,599.06 r0 top (schematic designator IC10)
IC7 "74LVC1G125GW" SC70-5 1761,1075 r180 top (schematic designator IC8)
IC8 "74LVC1G125GW" SC70-5 1753,1232 r0 top (schematic designator IC2)
J1 "LPC3240 Head P1" "LPC3240 HEAD" 1987.36,154.74 r180 bottom (schematic designator J2)
J2 "LPC3240 Head P1" "LPC3240 HEAD" 1987.36,1495 r180 bottom (schematic designator J1)
L1 "BLM18AG221SN1D" 0603R 1808.01,977 r270 bottom
L2 "BLM18AG221SN1D" 0603R 1811.91,1041 r180 bottom
LED1 "OVS-0806(Y)" CHIPLED_0805 144.66,321 r90 top (schematic designator LED2)
LED2 "OVS-0803(B)" CHIPLED_0805 143.66,385 r90 top (schematic designator LED1)
Q1 "32.768kHz" XTAL2 1135,1280 r0 top (schematic designator Q4)
Q2 "12MHz" XTAL4 1495.51,1052 r90 top (schematic designator Q5)
R1 "470E" 0402R 260.86,321 r0 top (schematic designator R3)
R2 "150E" 0402R 258.86,387 r0 top
R3 "0E" 0402R 1176,1169 r180 top (schematic designator R52)
R4 "0E" 0402R 1100,1169 r0 top (schematic designator R49)
R5 "22E" 0402R 771,428.46 r270 top (schematic designator R112)
R6 "33k" 0402R 827,428.86 r90 top (schematic designator R105)
R7 "22E" 0402R 876.5,1195.14 r90 top (schematic designator R110)
R8 "na (0E for boundary scan)" 0402R 829,1195.14 r270 top (schematic designator R12)
R9 "22E" 0402R 924,1195.14 r90 top (schematic designator R111)
R10 "na" 0402R 971.5,1195.14 r90 top (schematic designator R108)
R11 "33k" 0402R 1019,1195.14 r90 top (schematic designator R109)
R12 "0E" 0402R 1381.7,467.88 r0 top (schematic designator R89)
R13 "na" 0402R 1381.7,560.34 r180 top (schematic designator R86)
R14 "0E" 0402R 1381.7,513.88 r0 top (schematic designator R26)
R15 "na" 0402R 1381.7,607.2 r0 top (schematic designator R38)
R16 "22E" 0402R 1381.7,654.06 r0 top (schematic designator R33)
R17 "na" 0402R 1381.7,748.97 r180 top (schematic designator R87)
R18 "na" 0402R 1381.7,700.91 r0 top (schematic designator R32)
R19 "na" 0402R 1381.7,795.83 r0 top (schematic designator R39)
R20 "120k" 0402R 1384.64,892.72 r180 top (schematic designator R55)
R21 "0E" 0402R 1384.64,1029.9 r180 top (schematic designator R54)
R22 "0E" 0402R 1384.64,984.17 r180 top (schematic designator R53)
R23 "4k7" 0402R 1465.7,607.2 r180 top (schematic designator R81)
R24 "4k7" 0402R 1465.7,654.06 r0 top (schematic designator R80)
R25 "0E" 0402R 1465.7,748.97 r180 top (schematic designator R84)
R26 "22E" 0402R 1465.7,795.23 r180 top (schematic designator R85)
R27 "2k2" 0402R 203.73,474 r270 bottom (schematic designator R58)
R28 "33k" 0402R 439.95,474 r270 bottom (schematic designator R78)
R29 "3k3" 0402R 516.86,557 r180 bottom (schematic designator R73)
R30 "0E" 0402R 440.01,577.73 r270 bottom (schematic designator R79)
R31 "3k3" 0402R 516.86,603 r180 bottom (schematic designator R74)
R32 "3k3" 0402R 516.86,649 r180 bottom (schematic designator R71)
R33 "22E" 0402R 516.86,742 r180 bottom (schematic designator R113)
R34 "3k3" 0402R 516.86,695 r180 bottom (schematic designator R72)
R35 "10k" 0402R 566.45,318 r0 bottom (schematic designator R130)
R36 "na" 0402R 566.17,364 r180 bottom (schematic designator R129)
R37 "0E" 0402R 996,1048 r0 bottom (schematic designator R48)
R38 "10k" 0402R 829,1195.14 r270 bottom (schematic designator R135)
R39 "na" 0402R 996,1092 r0 bottom (schematic designator R47)
R40 "33k" 0402R 971.5,1195.14 r270 bottom (schematic designator R106)
R41 "na" 0402R 1019,1195.14 r270 bottom (schematic designator R107)
R42 "0E" 0402R 1129,1032 r90 bottom (schematic designator R46)
R43 "22E" 0402R 1381.7,654.06 r0 bottom (schematic designator R83)
R44 "0E" 0402R 1381.7,607.2 r0 bottom (schematic designator R82)
R45 "0E" 0402R 1381.7,795.83 r0 bottom (schematic designator R31)
R46 "10k" 0402R 1761.14,1109 r0 bottom (schematic designator R56)
R47 "33k" 0402R 1778.59,1249.32 r270 bottom (schematic designator R1)
RESET1 "MCDTSA6-2K" SMD-KEY 2012,1121 r270 top (schematic designator RESET)
RN1 "22E" EXB18V 1516.15,411.44 r270 top (schematic designator RN10)
RN2 "22E" EXB18V 1516.15,489.44 r270 top (schematic designator RN9)
SP1 "*" TP06SQ 1655.01,400.73 r180 bottom (schematic designator SP24)
SP2 "*" TP06SQ 1615.01,846.73 r180 bottom (schematic designator SP25)
SP3 "*" TP06SQ 1794.01,1145 r180 bottom (schematic designator SP21)
SP4 "*" TP06SQ 1851.01,1266.73 r180 bottom (schematic designator SP26)
SP5 "*" TP06SQ 1931.01,373.73 r180 bottom (schematic designator SP23)
SP6 "*" TP06SQ 1925.01,837.73 r180 bottom (schematic designator SP22)
TC1 "*" B1,27 502,816 r180 bottom (schematic designator TC2)
TC2 "*" B1,27 771,348 r180 bottom (schematic designator TC1)

## Footprints (in the part's own frame and the unit in brackets; to place one, negate y for a bottom-side part, rotate by r counter-clockwise, add the part's x,y. Pads: shape width x height; smd on the part's side, far side on the other; paste and mask are expansions set on the pad)
0402C [mm]
  rect 0.51x0.51 smd: 1(-0.41,0) 2(0.41,0)
  silkscreen extent -0.91,-0.5 0.91,0.5
0402R [mm]
  rect 0.51x0.51 smd: 1(-0.41,0) 2(0.41,0)
  silkscreen extent -0.91,-0.5 0.91,0.5
0603R [mil]
  rect 30x40 smd: 1(0.01,0.01) 2(60.01,0.01)
  silkscreen extent -26,-30 86,30
0805C [mm]
  rect 1x1 smd: 1(-1,0) 2(1,0)
  silkscreen extent -1.8,-0.8 1.8,0.8
B0,5MM [mm]
  rect 0.5x0.5 smd: TP(0,0)
B1,27 [mil]
  rect 50x50 smd: TP(0,0)
  silkscreen extent -25,-25 25,25
CHIPLED_0805 [mm]
  rect 1.2x1.2 smd: A(0,-1.05) C(0,1.05)
  silkscreen extent -0.62,-1 0.62,1.01
CTRIMCTZ3 [mil]
  rect 40x40 smd: 1(0,76.77) 2(0,-76.77)
  silkscreen extent -57,-85 57,83
EXB18V [mm]
  rect 0.3x0.3 smd: 1(-0.6,-0.3) 2(-0.2,-0.3) 3(0.2,-0.3) 4(0.6,-0.3) 5(0.6,0.3) 6(0.2,0.3) 7(-0.2,0.3) 8(-0.6,0.3)
  silkscreen extent -0.65,-0.25 0.65,0.25
FBGA60-6X10 [mm]
  round 0.35 smd: A1(-3.2,3.6) A2(-2.4,3.6) A3(-1.6,3.6) A7(1.6,3.6) A8(2.4,3.6) A9(3.2,3.6) B1(-3.2,2.8) B2(-2.4,2.8) B3(-1.6,2.8) B7(1.6,2.8) B8(2.4,2.8) B9(3.2,2.8) C1(-3.2,2) C2(-2.4,2) C3(-1.6,2) C7(1.6,2) C8(2.4,2) C9(3.2,2) D1(-3.2,1.2) D2(-2.4,1.2) D3(-1.6,1.2) D7(1.6,1.2) D8(2.4,1.2) D9(3.2,1.2) E1(-3.2,0.4) E2(-2.4,0.4) E3(-1.6,0.4) E7(1.6,0.4) E8(2.4,0.4) E9(3.2,0.4) F1(-3.2,-0.4) F2(-2.4,-0.4) F3(-1.6,-0.4) F7(1.6,-0.4) F8(2.4,-0.4) F9(3.2,-0.4) G1(-3.2,-1.2) G2(-2.4,-1.2) G3(-1.6,-1.2) G7(1.6,-1.2) G8(2.4,-1.2) G9(3.2,-1.2) H1(-3.2,-2) H2(-2.4,-2) H3(-1.6,-2) H7(1.6,-2) H8(2.4,-2) H9(3.2,-2) J1(-3.2,-2.8) J2(-2.4,-2.8) J3(-1.6,-2.8) J7(1.6,-2.8) J8(2.4,-2.8) J9(3.2,-2.8) K1(-3.2,-3.6) K2(-2.4,-3.6) K3(-1.6,-3.6) K7(1.6,-3.6) K8(2.4,-3.6) K9(3.2,-3.6)
  silkscreen extent -4,-5 4,5
"LPC3240 HEAD" [mm]
  rect 1.2x1.2 hole 0.65: 1(0,0)
  round 1.2 hole 0.65: 2(0,-2) 3(2,0) 4(2,-2) 5(4,0) 6(4,-2) 7(6,0) 8(6,-2) 9(8,0) 10(8,-2) 11(10,0) 12(10,-2) 13(12,0) 14(12,-2) 15(14,0) 16(14,-2) 17(16,0) 18(16,-2) 19(18,0) 20(18,-2) 21(20,0) 22(20,-2) 23(22,0) 24(22,-2) 25(24,0) 26(24,-2) 27(26,0) 28(26,-2) 29(28,0) 30(28,-2) 31(30,0) 32(30,-2) 33(32,0) 34(32,-2) 35(34,0) 36(34,-2) 37(36,0) 38(36,-2) 39(38,0) 40(38,-2) 41(40,0) 42(40,-2) 43(42,0) 44(42,-2) 45(44,0) 46(44,-2) 47(46,0) 48(46,-2) 49(48,0) 50(48,-2)
  silkscreen extent -2.98,-3.6 49.24,1.95
SC70-5 [mm]
  rect 0.4x0.7 smd: 1(-0.65,-0.85) 2(0,-0.85) 3(0.65,-0.85) 4(0.65,0.85) 5(-0.65,0.85)
  silkscreen extent -1,-0.55 1,0.55
SMD-KEY [mm]
  rect 2x0.7 smd: 1(-3.7,2.25) 1(-3.7,-2.25) 2(3.7,2.25) 2(3.7,-2.25)
  silkscreen extent -3,-3 3,3
SOT23 [mm]
  rect 1x1.4 smd: 1(-0.95,-1.1) 2(0.95,-1.1) 3(0,1.1)
  silkscreen extent -1.42,-0.66 1.42,0.66
SOT143 [mm]
  rect 1.2x1.44 smd: 1(0.75,1.1)
  rect 1x1.44 smd: 2(-0.95,1.1) 3(-0.95,-1.1) 4(0.95,-1.1)
  silkscreen extent -1.45,-0.64 1.45,0.64
SOT1048-1 [mm]
  round 0.35 smd: A3(-5.184,6.78) A4(-4.387,6.78) A5(-3.589,6.78) A6(-2.791,6.78) A7(-1.994,6.78) A8(-1.196,6.78) A9(-0.399,6.78) A10(0.399,6.78) A11(1.196,6.78) A12(1.994,6.78) A13(2.791,6.78) A14(3.589,6.78) A15(4.387,6.78) A16(5.184,6.78) B2(-5.982,5.982) B3(-5.184,5.982) B4(-4.387,5.982) B5(-3.589,5.982) B6(-2.791,5.982) B7(-1.994,5.982) B8(-1.196,5.982) B9(-0.399,5.982) B10(0.399,5.982) B11(1.196,5.982) B12(1.994,5.982) B13(2.791,5.982) B14(3.589,5.982) B15(4.387,5.982) B16(5.184,5.982) B17(5.982,5.982) C1(-6.779,5.184) C2(-5.982,5.184) C3(-5.184,5.184) C4(-4.387,5.184) C5(-3.589,5.184) C6(-2.791,5.184) C7(-1.994,5.184) C8(-1.196,5.184) C9(-0.399,5.184) C10(0.399,5.184) C11(1.196,5.184) C12(1.994,5.184) C13(2.791,5.184) C14(3.589,5.184) C15(4.387,5.184) C16(5.184,5.184) C17(5.982,5.184) C18(6.779,5.184) D1(-6.779,4.387) D2(-5.982,4.387) D3(-5.184,4.387) D4(-4.387,4.387) D5(-3.589,4.387) D6(-2.791,4.387) D7(-1.994,4.387) D8(-1.196,4.387) D9(-0.399,4.387) D10(0.399,4.387) D11(1.196,4.387) D12(1.994,4.387) D13(2.791,4.387) D14(3.589,4.387) D15(4.387,4.387) D16(5.184,4.387) D17(5.982,4.387) D18(6.779,4.387) E1(-6.779,3.589) E2(-5.982,3.589) E3(-5.184,3.589) E4(-4.387,3.589) E5(-3.589,3.589) E6(-2.791,3.589) E7(-1.994,3.589) E8(-1.196,3.589) E9(-0.399,3.589) E10(0.399,3.589) E11(1.196,3.589) E12(1.994,3.589) E13(2.791,3.589) E14(3.589,3.589) E15(4.387,3.589) E16(5.184,3.589) E17(5.982,3.589) E18(6.779,3.589) F1(-6.779,2.792) F2(-5.982,2.792) F3(-5.184,2.792) F4(-4.387,2.792) F5(-3.589,2.792) F6(-2.791,2.792) F7(-1.994,2.792) F8(-1.196,2.792) F9(-0.399,2.792) F10(0.399,2.792) F11(1.196,2.792) F12(1.994,2.792) F13(2.791,2.792) F14(3.589,2.792) F15(4.387,2.792) F16(5.184,2.792) F17(5.982,2.792) F18(6.779,2.792) G1(-6.779,1.994) G2(-5.982,1.994) G3(-5.184,1.994) G4(-4.387,1.994) G5(-3.589,1.994) G6(-2.791,1.994) G7(-1.994,1.994) G8(-1.196,1.994) G9(-0.399,1.994) G10(0.399,1.994) G11(1.196,1.994) G12(1.994,1.994) G13(2.791,1.994) G14(3.589,1.994) G15(4.387,1.994) G16(5.184,1.994) G17(5.982,1.994) G18(6.779,1.994) H1(-6.779,1.197) H2(-5.982,1.197) H3(-5.184,1.197) H4(-4.387,1.197) H5(-3.589,1.197) H6(-2.791,1.197) H7(-1.994,1.197) H12(1.994,1.197) H13(2.791,1.197) H14(3.589,1.197) H15(4.387,1.197) H16(5.184,1.197) H17(5.982,1.197) H18(6.779,1.197) J1(-6.779,0.399) J2(-5.982,0.399) J3(-5.184,0.399) J4(-4.387,0.399) J5(-3.589,0.399) J6(-2.791,0.399) J7(-1.994,0.399) J12(1.994,0.399) J13(2.791,0.399) J14(3.589,0.399) J15(4.387,0.399) J16(5.184,0.399) J17(5.982,0.399) J18(6.779,0.399) K1(-6.779,-0.399) K2(-5.982,-0.399) K3(-5.184,-0.399) K4(-4.387,-0.399) K5(-3.589,-0.399) K6(-2.791,-0.399) K7(-1.994,-0.399) K12(1.994,-0.399) K13(2.791,-0.399) K14(3.589,-0.399) K15(4.387,-0.399) K16(5.184,-0.399) K17(5.982,-0.399) K18(6.779,-0.399) L1(-6.779,-1.196) L2(-5.982,-1.196) L3(-5.184,-1.196) L4(-4.387,-1.196) L5(-3.589,-1.196) L6(-2.791,-1.196) L7(-1.994,-1.196) L12(1.994,-1.196) L13(2.791,-1.196) L14(3.589,-1.196) L15(4.387,-1.196) L16(5.184,-1.196) L17(5.982,-1.196) L18(6.779,-1.196) M1(-6.779,-1.994) M2(-5.982,-1.994) M3(-5.184,-1.994) M4(-4.387,-1.994) M5(-3.589,-1.994) M6(-2.791,-1.994) M7(-1.994,-1.994) M8(-1.196,-1.994) M9(-0.399,-1.994) M10(0.399,-1.994) M11(1.196,-1.994) M12(1.994,-1.994) M13(2.791,-1.994) M14(3.589,-1.994) M15(4.387,-1.994) M16(5.184,-1.994) M17(5.982,-1.994) M18(6.779,-1.994) N1(-6.779,-2.791) N2(-5.982,-2.791) N3(-5.184,-2.791) N4(-4.387,-2.791) N5(-3.589,-2.791) N6(-2.791,-2.791) N7(-1.994,-2.791) N8(-1.196,-2.791) N9(-0.399,-2.791) N10(0.399,-2.791) N11(1.196,-2.791) N12(1.994,-2.791) N13(2.791,-2.791) N14(3.589,-2.791) N15(4.387,-2.791) N16(5.184,-2.791) N17(5.982,-2.791) N18(6.779,-2.791) P1(-6.779,-3.589) P2(-5.982,-3.589) P3(-5.184,-3.589) P4(-4.387,-3.589) P5(-3.589,-3.589) P6(-2.791,-3.589) P7(-1.994,-3.589) P8(-1.196,-3.589) P9(-0.399,-3.589) P10(0.399,-3.589) P11(1.196,-3.589) P12(1.994,-3.589) P13(2.791,-3.589) P14(3.589,-3.589) P15(4.387,-3.589) P16(5.184,-3.589) P17(5.982,-3.589) P18(6.779,-3.589) R1(-6.779,-4.386) R2(-5.982,-4.386) R3(-5.184,-4.386) R4(-4.387,-4.386) R5(-3.589,-4.386) R6(-2.791,-4.386) R7(-1.994,-4.386) R8(-1.196,-4.386) R9(-0.399,-4.386) R10(0.399,-4.386) R11(1.196,-4.386) R12(1.994,-4.386) R13(2.791,-4.386) R14(3.589,-4.386) R15(4.387,-4.386) R16(5.184,-4.386) R17(5.982,-4.386) R18(6.779,-4.386) T1(-6.779,-5.184) T2(-5.982,-5.184) T3(-5.184,-5.184) T4(-4.387,-5.184) T5(-3.589,-5.184) T6(-2.791,-5.184) T7(-1.994,-5.184) T8(-1.196,-5.184) T9(-0.399,-5.184) T10(0.399,-5.184) T11(1.196,-5.184) T12(1.994,-5.184) T13(2.791,-5.184) T14(3.589,-5.184) T15(4.387,-5.184) T16(5.184,-5.184) T17(5.982,-5.184) T18(6.779,-5.184) U2(-5.982,-5.982) U3(-5.184,-5.982) U4(-4.387,-5.982) U5(-3.589,-5.982) U6(-2.791,-5.982) U7(-1.994,-5.982) U8(-1.196,-5.982) U9(-0.399,-5.982) U10(0.399,-5.982) U11(1.196,-5.982) U12(1.994,-5.982) U13(2.791,-5.982) U14(3.589,-5.982) U15(4.387,-5.982) U16(5.184,-5.982) U17(5.982,-5.982) V3(-5.184,-6.779) V4(-4.387,-6.779) V5(-3.589,-6.779) V6(-2.791,-6.779) V7(-1.994,-6.779) V8(-1.196,-6.779) V9(-0.399,-6.779) V10(0.399,-6.779) V11(1.196,-6.779) V12(1.994,-6.779) V13(2.791,-6.779) V14(3.589,-6.779) V15(4.387,-6.779) V16(5.184,-6.779)
  silkscreen extent -7.62,-7.58 7.58,7.62
TP06SQ [mil]
  rect 23.61x23.61 smd: TP(0,0)
TSOP48 [mm]
  rect 1.1x0.3 smd: 1(-9.625,5.75) 2(-9.625,5.25) 3(-9.625,4.75) 4(-9.625,4.25) 5(-9.625,3.75) 6(-9.625,3.25) 7(-9.625,2.75) 8(-9.625,2.25) 9(-9.625,1.75) 10(-9.625,1.25) 11(-9.625,0.75) 12(-9.625,0.25) 13(-9.625,-0.25) 14(-9.625,-0.75) 15(-9.625,-1.25) 16(-9.625,-1.75) 17(-9.625,-2.25) 18(-9.625,-2.75) 19(-9.625,-3.25) 20(-9.625,-3.75) 21(-9.625,-4.25) 22(-9.625,-4.75) 23(-9.625,-5.25) 24(-9.625,-5.75) 25(9.625,-5.75) 26(9.625,-5.25) 27(9.625,-4.75) 28(9.625,-4.25) 29(9.625,-3.75) 30(9.625,-3.25) 31(9.625,-2.75) 32(9.625,-2.25) 33(9.625,-1.75) 34(9.625,-1.25) 35(9.625,-0.75) 36(9.625,-0.25) 37(9.625,0.25) 38(9.625,0.75) 39(9.625,1.25) 40(9.625,1.75) 41(9.625,2.25) 42(9.625,2.75) 43(9.625,3.25) 44(9.625,3.75) 45(9.625,4.25) 46(9.625,4.75) 47(9.625,5.25) 48(9.625,5.75)
  silkscreen extent -11.24,-6 9.15,6.12
TSSOP8 [mm]
  rect 0.35x1.2 smd: 1(-0.975,-2.925) 2(-0.325,-2.925) 3(0.325,-2.925) 4(0.975,-2.925) 5(0.975,2.925) 6(0.325,2.925) 7(-0.325,2.925) 8(-0.975,2.925)
  silkscreen extent -2.08,-3.35 1.4,2.15
XTAL2 [mm]
  rect 1x1.8 smd: 1(-1.19,0) 2(1.31,0)
  silkscreen extent -1.91,-0.91 2.03,0.91
XTAL4 [mm]
  rect 1.4x1.15 smd: 1(-1.6,-0.8) 2(0.6,-0.8) 3(0.6,0.8) 4(-1.6,0.8)
  silkscreen extent -3.1,-1.7 1.4,1.5

## Part data
1 2 3 4 5 6 7 8 9 10 11 12 13 14 15 16 A1 A2 A3 A4 A5 A6 A7 A8 A9 A10 A11 A12 A13 A14 A15: library part TP0.5
C1 C2 C4 C5 C6 C7 C8 C9 C10 C13 C14 C15 C16 C17 C18 C19 C20 C21 C22 C23 C24 C25 C26 C27 C28 C29 C30 C31 C32 C33 C34 C35 C36 C37 C38 C39 C40 C41 C43 C44 C45 C46 C47 C48 C49 C50 C51 C52 C53 C54 C55 C57 C58 C59 C60 C61 C62 C63 C65: library part C-EUC0402
C3: library part C-TRIMMCTZ3
C11 C12 C42 C56 C64: library part C-EUC0805
D1 D2: library part BAS16
IC1: library part H27U1G8F2BTR
IC3: library part LPC32X0
IC4 IC7 IC8: library part 74LVC1G125DCK
IC5: library part CAT811S
L1 L2: library part L_0603
Q1: library part RTCCRYSTAL
Q2: library part CRYSTAL4
R1 R2 R3 R4 R5 R6 R7 R8 R9 R10 R11 R12 R13 R14 R15 R16 R17 R18 R19 R20 R21 R22 R23 R24 R25 R26 R27 R28 R29 R30 R31 R32 R33 R34 R35 R36 R37 R38 R39 R40 R41 R42 R43 R44 R45 R46 R47: library part R-EU_R0402
RN1 RN2: library part 4R-NEXB18V
SP1 SP2 SP3 SP4 SP5 SP6: library part TPTP06SQ
TC1 TC2: library part TPB1,27

## Via types
v1: diameter 16, hole 8, TOP to BOTTOM, tented both sides, 541 vias

## Nets (pads, with @x,y where several pads share a name; then routed paths per layer and width w, separated by ;. In a path a pad name is that pad's centre, name@x,y a point inside that pad or via, vN(x,y) a via of type N, cw(c..) or ccw(c..) an arc to the next point about the centre after c; other vN are vias at no path point)
pads on no net: 1.TP 2.TP 3.TP 4.TP 5.TP 6.TP 7.TP 8.TP 9.TP 10.TP 11.TP 12.TP 13.TP 14.TP 15.TP 16.TP A1.TP A2.TP A3.TP A4.TP A5.TP A6.TP A7.TP A8.TP A9.TP A10.TP A11.TP A12.TP A13.TP A14.TP A15.TP C1.1 C1.2 C2.1 C2.2 C3.1 C3.2 C4.1 C4.2 C5.1 C5.2 C6.1 C6.2 C7.1 C7.2 C8.1 C8.2 C9.1 C9.2 C10.1 C10.2 C11.1 C11.2 C12.1 C12.2 C13.1 C13.2 C14.1 C14.2 C15.1 C15.2 C16.1 C16.2 C17.1 C17.2 C18.1 C18.2 C19.1 C19.2 C20.1 C20.2 C21.1 C21.2 C22.1 C22.2 C23.1 C23.2 C24.1 C24.2 C25.1 C25.2 C26.1 C26.2 C27.1 C27.2 C28.1 C28.2 C29.1 C29.2 C30.1 C30.2 C31.1 C31.2 C32.1 C32.2 C33.1 C33.2 C34.1 C34.2 C35.1 C35.2 C36.1 C36.2 C37.1 C37.2 C38.1 C38.2 C39.1 C39.2 C40.1 C40.2 C41.1 C41.2 C42.1 C42.2 C43.1 C43.2 C44.1 C44.2 C45.1 C45.2 C46.1 C46.2 C47.1 C47.2 C48.1 C48.2 C49.1 C49.2 C50.1 C50.2 C51.1 C51.2 C52.1 C52.2 C53.1 C53.2 C54.1 C54.2 C55.1 C55.2 C56.1 C56.2 C57.1 C57.2 C58.1 C58.2 C59.1 C59.2 C60.1 C60.2 C61.1 C61.2 C62.1 C62.2 C63.1 C63.2 C64.1 C64.2 C65.1 C65.2 D1.1 D1.2 D1.3 D2.1 D2.2 D2.3 IC1.1 IC1.2 IC1.3 IC1.4 IC1.5 IC1.6 IC1.7 IC1.8 IC1.9 IC1.10 IC1.11 IC1.12 IC1.13 IC1.14 IC1.15 IC1.16 IC1.17 IC1.18 IC1.19 IC1.20 IC1.21 IC1.22 IC1.23 IC1.24 IC1.25 IC1.26 IC1.27 IC1.28 IC1.29 IC1.30 IC1.31 IC1.32 IC1.33 IC1.34 IC1.35 IC1.36 IC1.37 IC1.38 IC1.39 IC1.40 IC1.41 IC1.42 IC1.43 IC1.44 IC1.45 IC1.46 IC1.47 IC1.48 IC2.1 IC2.2 IC2.3 IC2.4 IC2.5 IC2.6 IC2.7 IC2.8 IC3.A3 IC3.A4 IC3.A5 IC3.A6 IC3.A7 IC3.A8 IC3.A9 IC3.A10 IC3.A11 IC3.A12 IC3.A13 IC3.A14 IC3.A15 IC3.A16 IC3.B2 IC3.B3 IC3.B4 IC3.B5 IC3.B6 IC3.B7 IC3.B8 IC3.B9 IC3.B10 IC3.B11 IC3.B12 IC3.B13 IC3.B14 IC3.B15 IC3.B16 IC3.B17 IC3.C1 IC3.C2 IC3.C3 IC3.C4 IC3.C5 IC3.C6 IC3.C7 IC3.C8 IC3.C9 IC3.C10 IC3.C11 IC3.C12 IC3.C13 IC3.C14 IC3.C15 IC3.C16 IC3.C17 IC3.C18 IC3.D1 IC3.D2 IC3.D3 IC3.D4 IC3.D5 IC3.D6 IC3.D7 IC3.D8 IC3.D9 IC3.D10 IC3.D11 IC3.D12 IC3.D13 IC3.D14 IC3.D15 IC3.D16 IC3.D17 IC3.D18 IC3.E1 IC3.E2 IC3.E3 IC3.E4 IC3.E5 IC3.E6 IC3.E7 IC3.E8 IC3.E9 IC3.E10 IC3.E11 IC3.E12 IC3.E13 IC3.E14 IC3.E15 IC3.E16 IC3.E17 IC3.E18 IC3.F1 IC3.F2 IC3.F3 IC3.F4 IC3.F5 IC3.F6 IC3.F7 IC3.F8 IC3.F9 IC3.F10 IC3.F11 IC3.F12 IC3.F13 IC3.F14 IC3.F15 IC3.F16 IC3.F17 IC3.F18 IC3.G1 IC3.G2 IC3.G3 IC3.G4 IC3.G5 IC3.G6 IC3.G7 IC3.G8 IC3.G9 IC3.G10 IC3.G11 IC3.G12 IC3.G13 IC3.G14 IC3.G15 IC3.G16 IC3.G17 IC3.G18 IC3.H1 IC3.H2 IC3.H3 IC3.H4 IC3.H5 IC3.H6 IC3.H7 IC3.H12 IC3.H13 IC3.H14 IC3.H15 IC3.H16 IC3.H17 IC3.H18 IC3.J1 IC3.J2 IC3.J3 IC3.J4 IC3.J5 IC3.J6 IC3.J7 IC3.J12 IC3.J13 IC3.J14 IC3.J15 IC3.J16 IC3.J17 IC3.J18 IC3.K1 IC3.K2 IC3.K3 IC3.K4 IC3.K5 IC3.K6 IC3.K7 IC3.K12 IC3.K13 IC3.K14 IC3.K15 IC3.K16 IC3.K17 IC3.K18 IC3.L1 IC3.L2 IC3.L3 IC3.L4 IC3.L5 IC3.L6 IC3.L7 IC3.L12 IC3.L13 IC3.L14 IC3.L15 IC3.L16 IC3.L17 IC3.L18 IC3.M1 IC3.M2 IC3.M3 IC3.M4 IC3.M5 IC3.M6 IC3.M7 IC3.M8 IC3.M9 IC3.M10 IC3.M11 IC3.M12 IC3.M13 IC3.M14 IC3.M15 IC3.M16 IC3.M17 IC3.M18 IC3.N1 IC3.N2 IC3.N3 IC3.N4 IC3.N5 IC3.N6 IC3.N7 IC3.N8 IC3.N9 IC3.N10 IC3.N11 IC3.N12 IC3.N13 IC3.N14 IC3.N15 IC3.N16 IC3.N17 IC3.N18 IC3.P1 IC3.P2 IC3.P3 IC3.P4 IC3.P5 IC3.P6 IC3.P7 IC3.P8 IC3.P9 IC3.P10 IC3.P11 IC3.P12 IC3.P13 IC3.P14 IC3.P15 IC3.P16 IC3.P17 IC3.P18 IC3.R1 IC3.R2 IC3.R3 IC3.R4 IC3.R5 IC3.R6 IC3.R7 IC3.R8 IC3.R9 IC3.R10 IC3.R11 IC3.R12 IC3.R13 IC3.R14 IC3.R15 IC3.R16 IC3.R17 IC3.R18 IC3.T1 IC3.T2 IC3.T3 IC3.T4 IC3.T5 IC3.T6 IC3.T7 IC3.T8 IC3.T9 IC3.T10 IC3.T11 IC3.T12 IC3.T13 IC3.T14 IC3.T15 IC3.T16 IC3.T17 IC3.T18 IC3.U2 IC3.U3 IC3.U4 IC3.U5 IC3.U6 IC3.U7 IC3.U8 IC3.U9 IC3.U10 IC3.U11 IC3.U12 IC3.U13 IC3.U14 IC3.U15 IC3.U16 IC3.U17 IC3.V3 IC3.V4 IC3.V5 IC3.V6 IC3.V7 IC3.V8 IC3.V9 IC3.V10 IC3.V11 IC3.V12 IC3.V13 IC3.V14 IC3.V15 IC3.V16 IC4.1 IC4.2 IC4.3 IC4.4 IC4.5 IC5.1 IC5.2 IC5.3 IC5.4 IC6.A1 IC6.A2 IC6.A3 IC6.A7 IC6.A8 IC6.A9 IC6.B1 IC6.B2 IC6.B3 IC6.B7 IC6.B8 IC6.B9 IC6.C1 IC6.C2 IC6.C3 IC6.C7 IC6.C8 IC6.C9 IC6.D1 IC6.D2 IC6.D3 IC6.D7 IC6.D8 IC6.D9 IC6.E1 IC6.E2 IC6.E3 IC6.E7 IC6.E8 IC6.E9 IC6.F1 IC6.F2 IC6.F3 IC6.F7 IC6.F8 IC6.F9 IC6.G1 IC6.G2 IC6.G3 IC6.G7 IC6.G8 IC6.G9 IC6.H1 IC6.H2 IC6.H3 IC6.H7 IC6.H8 IC6.H9 IC6.J1 IC6.J2 IC6.J3 IC6.J7 IC6.J8 IC6.J9 IC6.K1 IC6.K2 IC6.K3 IC6.K7 IC6.K8 IC6.K9 IC7.1 IC7.2 IC7.3 IC7.4 IC7.5 IC8.1 IC8.2 IC8.3 IC8.4 IC8.5 J1.1 J1.2 J1.3 J1.4 J1.5 J1.6 J1.7 J1.8 J1.9 J1.10 J1.11 J1.12 J1.13 J1.14 J1.15 J1.16 J1.17 J1.18 J1.19 J1.20 J1.21 J1.22 J1.23 J1.24 J1.25 J1.26 J1.27 J1.28 J1.29 J1.30 J1.31 J1.32 J1.33 J1.34 J1.35 J1.36 J1.37 J1.38 J1.39 J1.40 J1.41 J1.42 J1.43 J1.44 J1.45 J1.46 J1.47 J1.48 J1.49 J1.50 J2.1 J2.2 J2.3 J2.4 J2.5 J2.6 J2.7 J2.8 J2.9 J2.10 J2.11 J2.12 J2.13 J2.14 J2.15 J2.16 J2.17 J2.18 J2.19 J2.20 J2.21 J2.22 J2.23 J2.24 J2.25 J2.26 J2.27 J2.28 J2.29 J2.30 J2.31 J2.32 J2.33 J2.34 J2.35 J2.36 J2.37 J2.38 J2.39 J2.40 J2.41 J2.42 J2.43 J2.44 J2.45 J2.46 J2.47 J2.48 J2.49 J2.50 L1.1 L1.2 L2.1 L2.2 LED1.A LED1.C LED2.A LED2.C Q1.1 Q1.2 Q2.1 Q2.2 Q2.3 Q2.4 R1.1 R1.2 R2.1 R2.2 R3.1 R3.2 R4.1 R4.2 R5.1 R5.2 R6.1 R6.2 R7.1 R7.2 R8.1 R8.2 R9.1 R9.2 R10.1 R10.2 R11.1 R11.2 R12.1 R12.2 R13.1 R13.2 R14.1 R14.2 R15.1 R15.2 R16.1 R16.2 R17.1 R17.2 R18.1 R18.2 R19.1 R19.2 R20.1 R20.2 R21.1 R21.2 R22.1 R22.2 R23.1 R23.2 R24.1 R24.2 R25.1 R25.2 R26.1 R26.2 R27.1 R27.2 R28.1 R28.2 R29.1 R29.2 R30.1 R30.2 R31.1 R31.2 R32.1 R32.2 R33.1 R33.2 R34.1 R34.2 R35.1 R35.2 R36.1 R36.2 R37.1 R37.2 R38.1 R38.2 R39.1 R39.2 R40.1 R40.2 R41.1 R41.2 R42.1 R42.2 R43.1 R43.2 R44.1 R44.2 R45.1 R45.2 R46.1 R46.2 R47.1 R47.2 RESET1.1 RESET1.2 RN1.1 RN1.2 RN1.3 RN1.4 RN1.5 RN1.6 RN1.7 RN1.8 RN2.1 RN2.2 RN2.3 RN2.4 RN2.5 RN2.6 RN2.7 RN2.8 SP1.TP SP2.TP SP3.TP SP4.TP SP5.TP SP6.TP TC1.TP TC2.TP